# Altium PCB Condor2_REV_C.PcbDoc
Units mm, origin at the board's own origin, x right, y up, seen from the top; angles counter-clockwise.
Board outline 206.96 x 160.02 mm, 4 copper layers (Top Layer, Layer 1, Layer 2, Bottom Layer), stack 1.641 mm thick; 62 components, 99 nets, 385 pads, 129 vias.
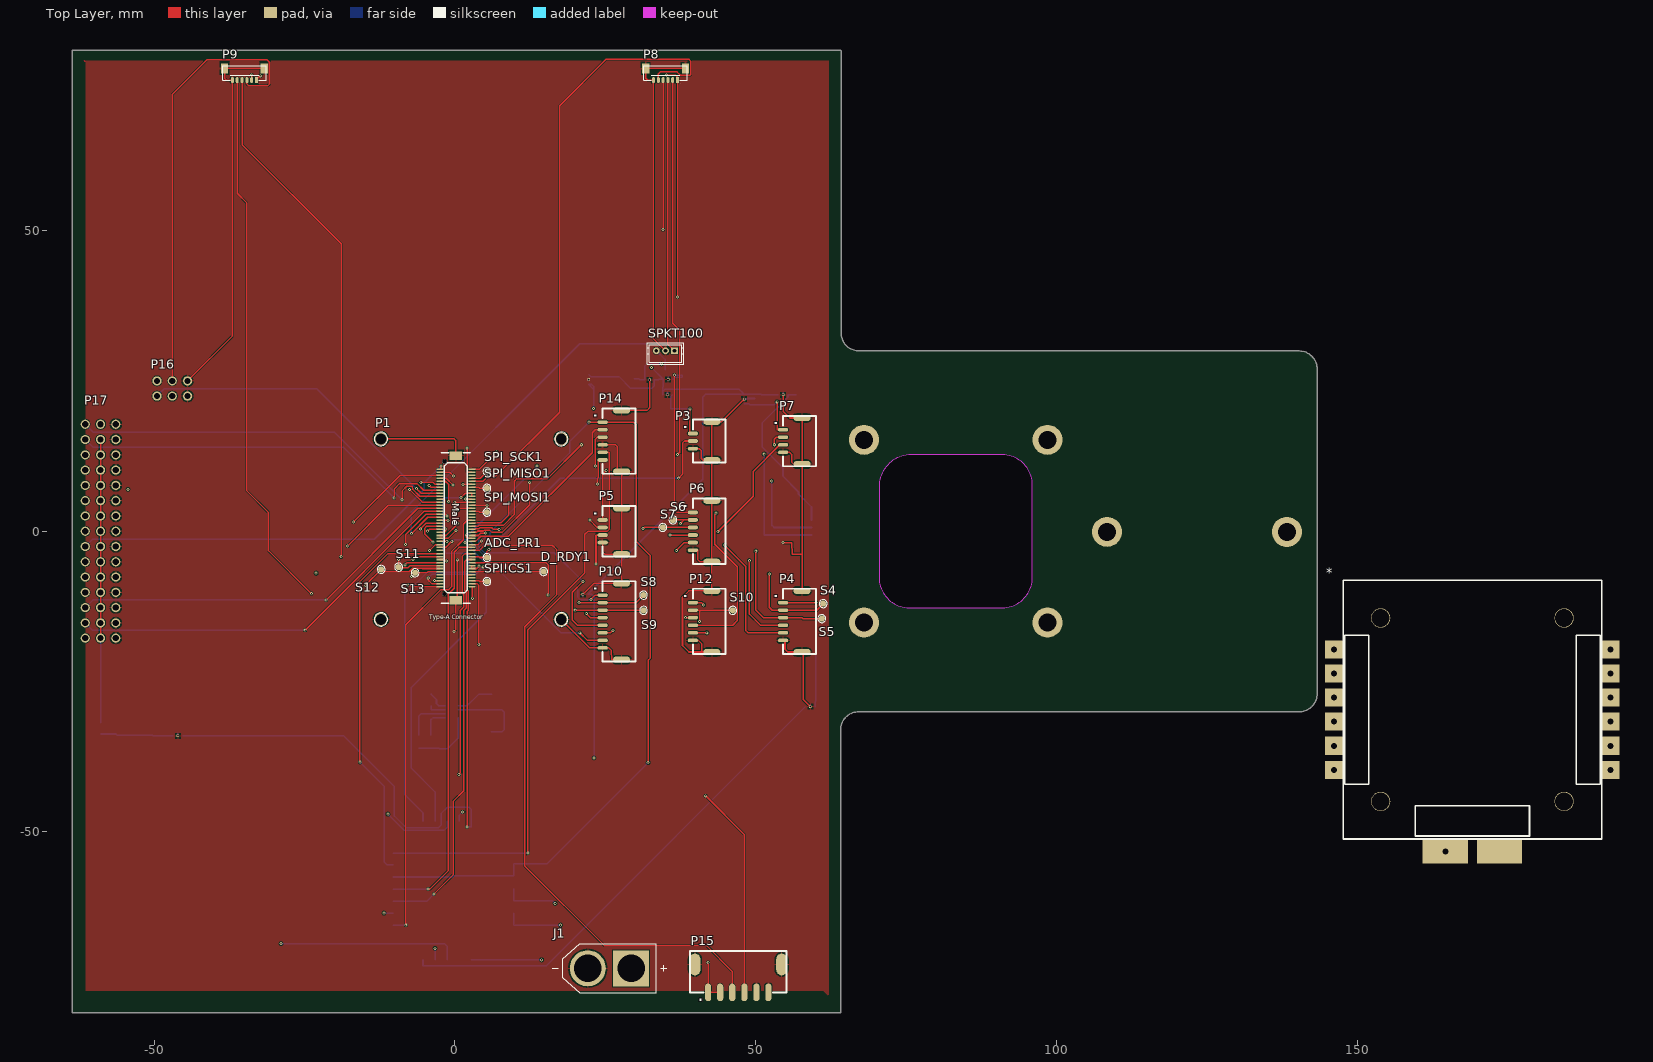
[diagram p0: Top Layer view]
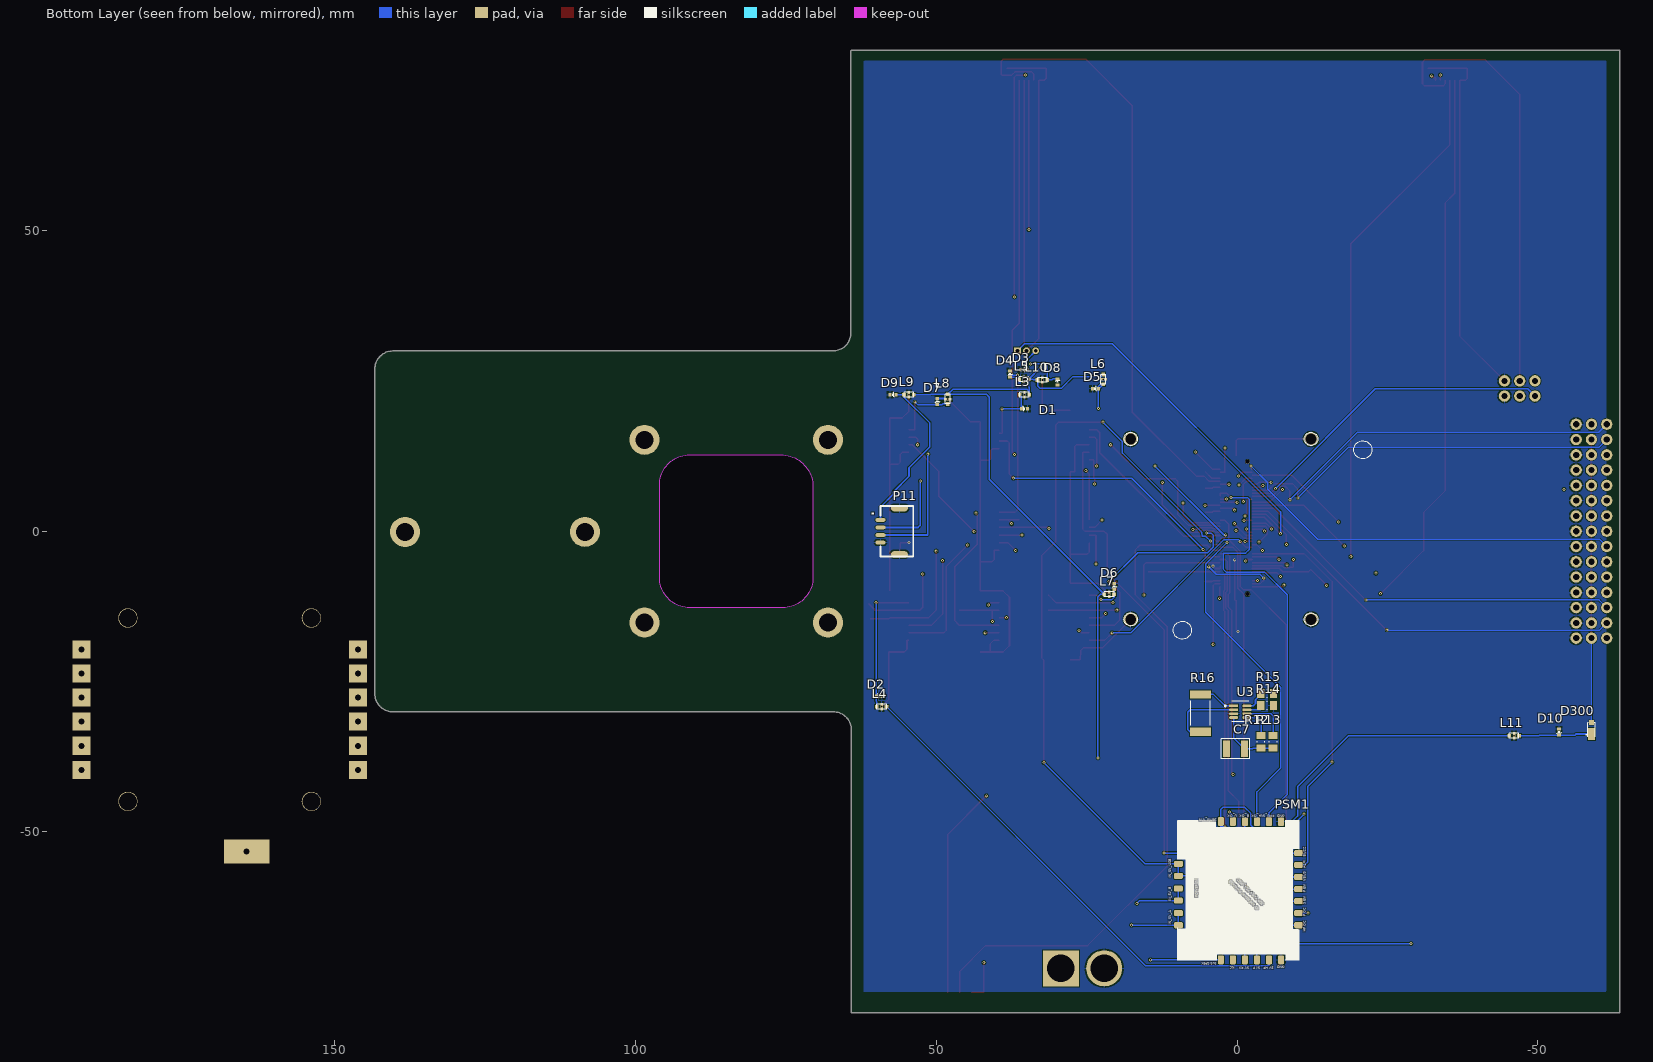
[diagram p1: Bottom Layer view, seen from below]
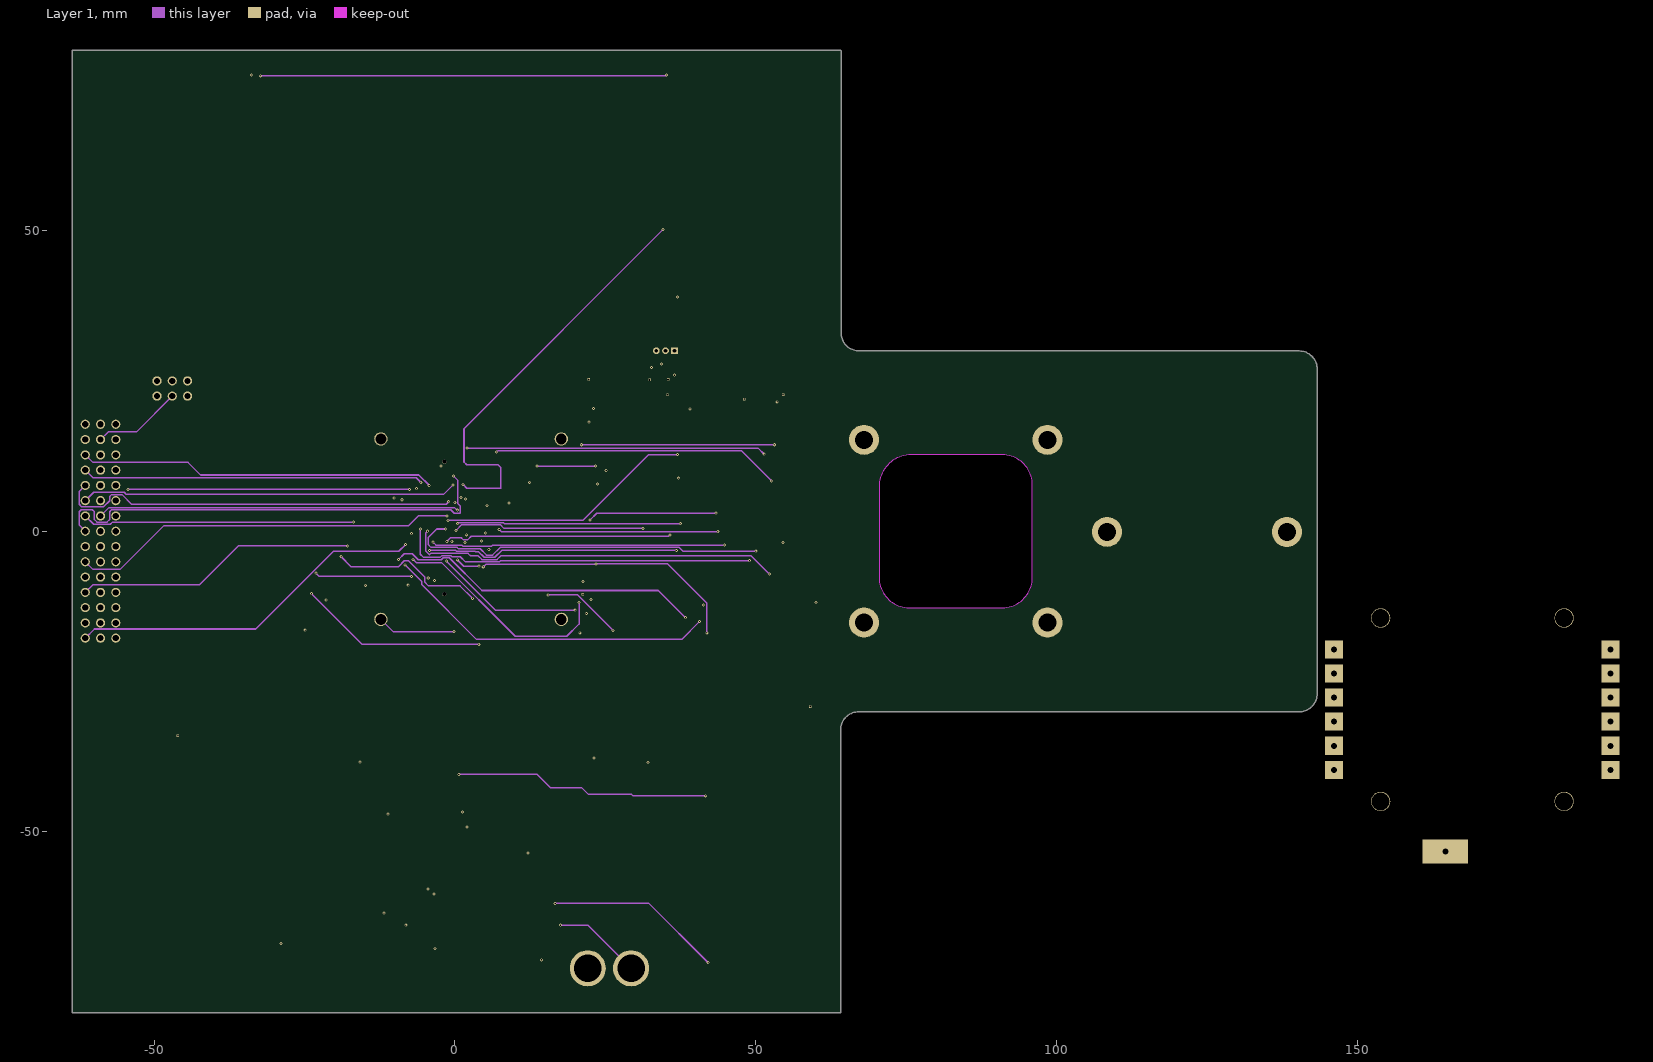
[diagram p2: Layer 1]
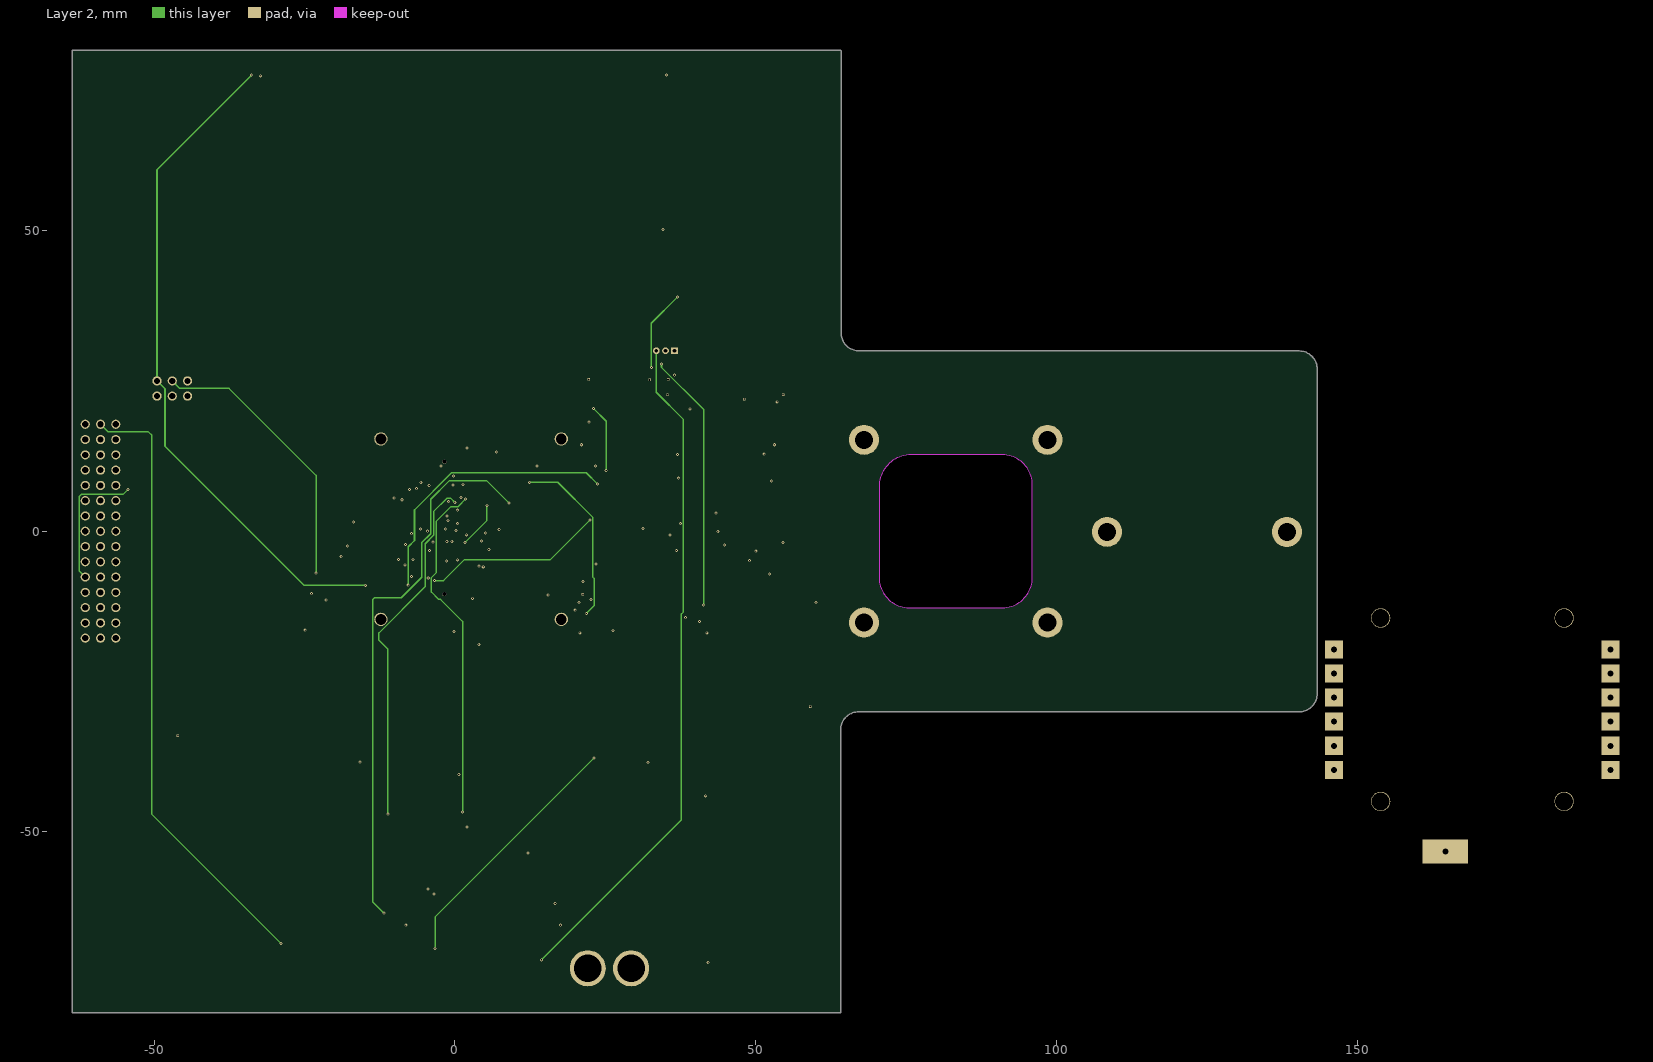
[diagram p3: Layer 2]
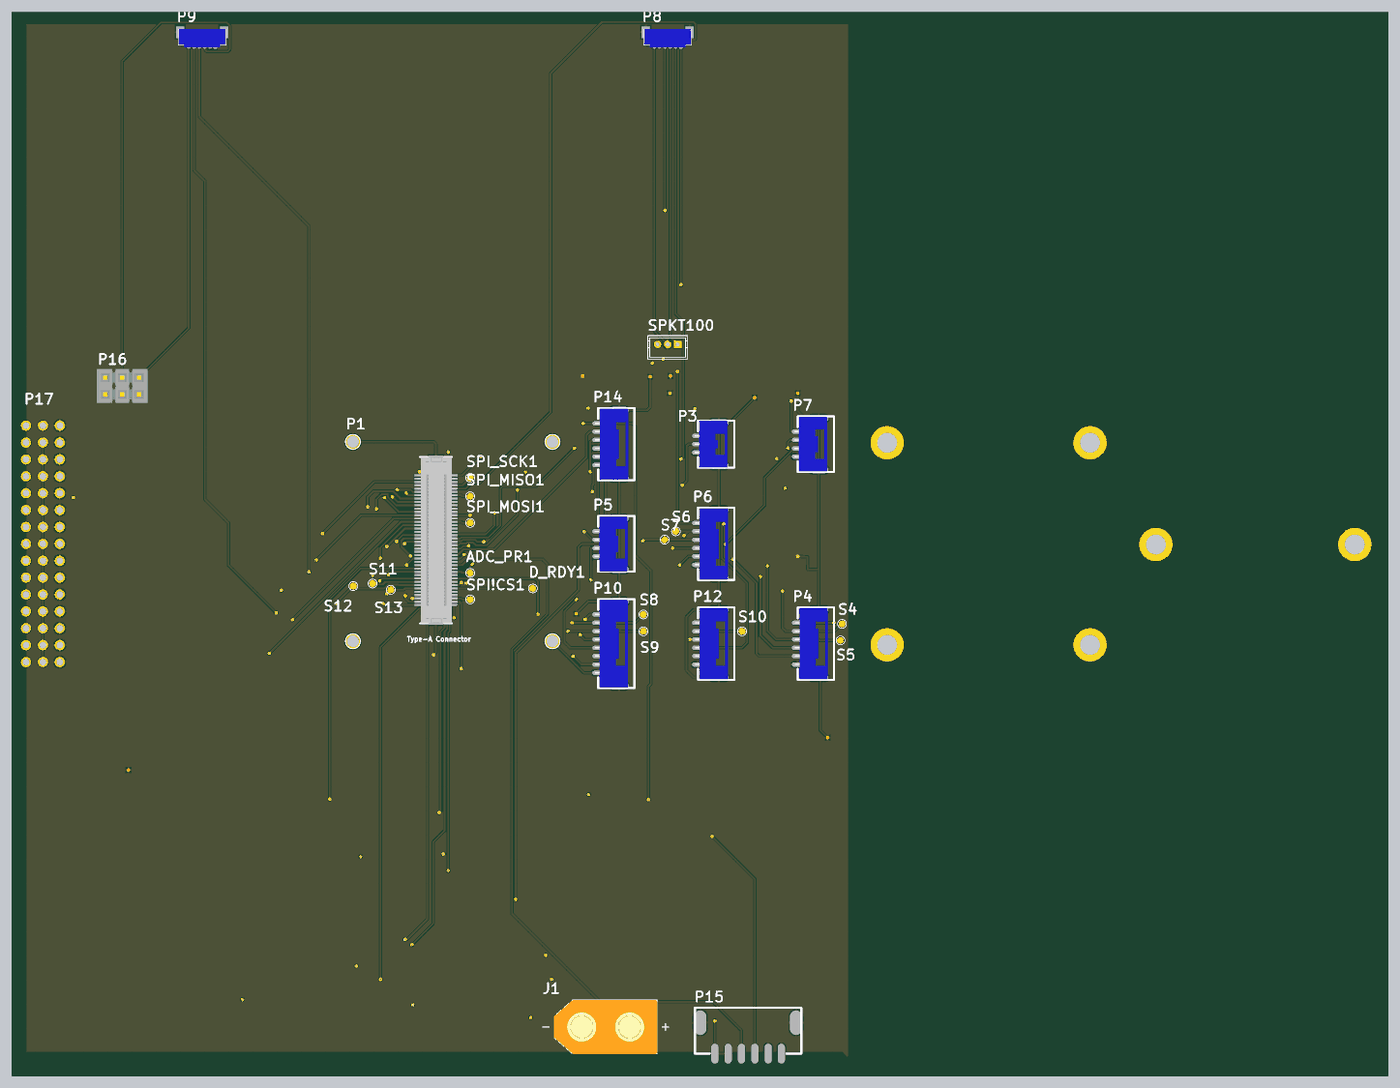
[diagram p4: 3D render of the assembled board from above, using the file's embedded part models]
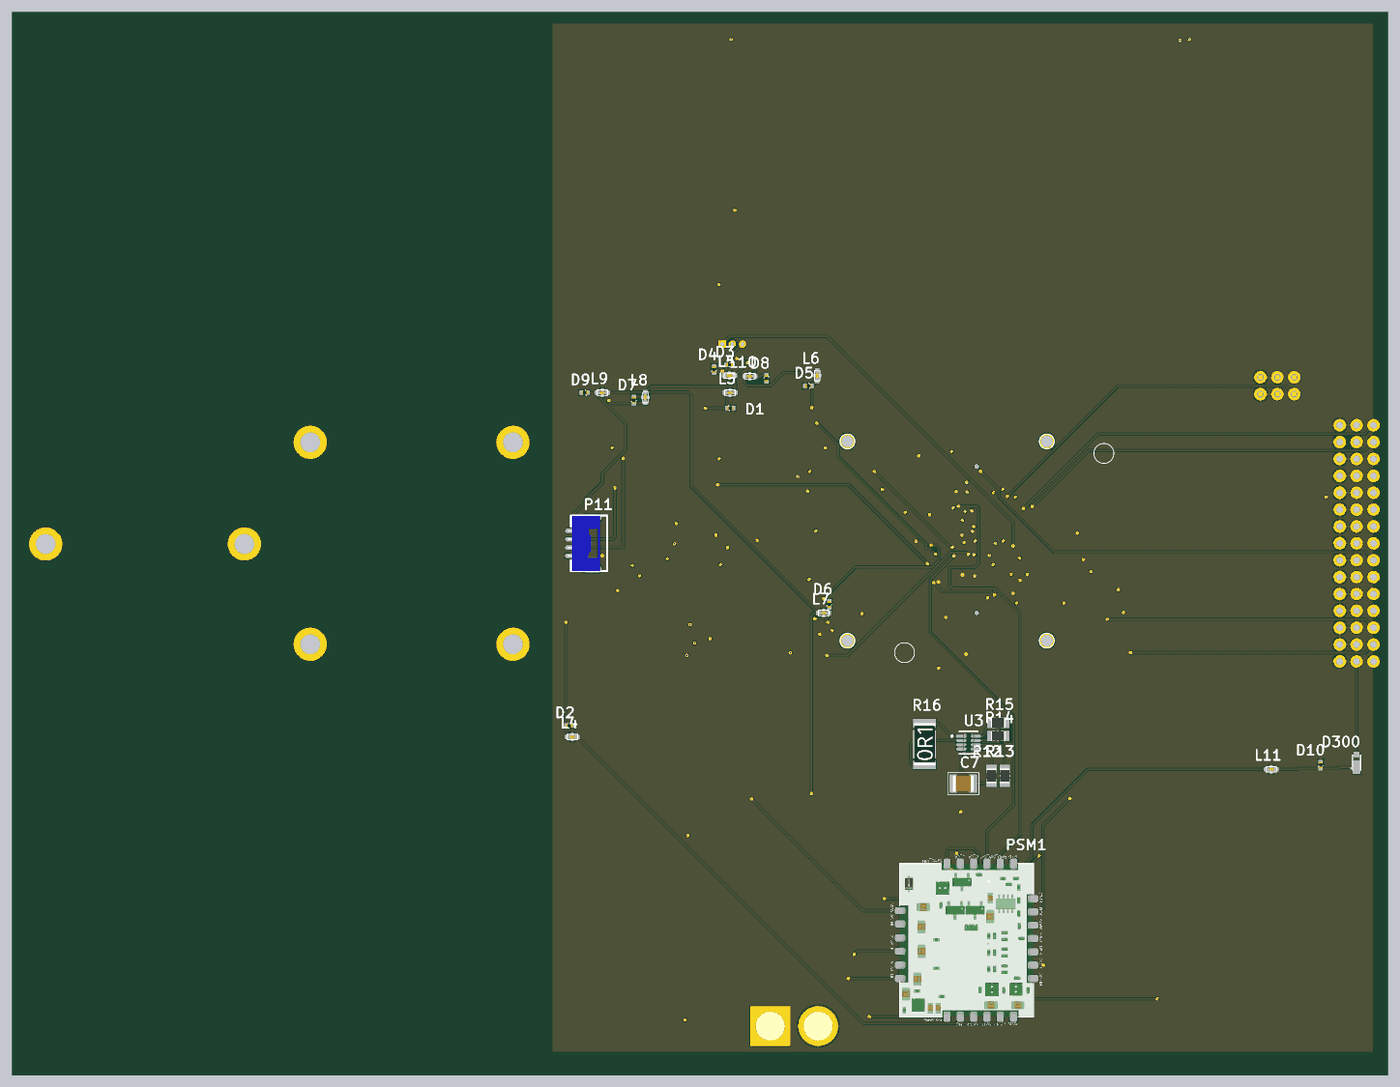
[diagram p5: 3D render of the assembled board from below, using the file's embedded part models]

## Layer stack, top to bottom
Top Solder: solder mask 0.0102, Solder Resist, Dk 3.5
Top Layer: signal copper 0.0356
Dielectric 1: core 0.5, FR-4, Dk 4.8
Layer 1: signal copper 0.035
Dielectric 2: prepreg 0.5, PP-006, Dk 4.8
Layer 2: signal copper 0.035
Dielectric 4: core 0.5, Dk 4.8
Bottom Layer: signal copper 0.0356
Bottom Solder: solder mask 0.0102, Solder Resist, Dk 3.5

## Board outline
-63.627,-80.061 -63.627,79.959 64.11,79.959 64.186,79.883 64.186,32.972 ccw(c67.186,32.972) 67.186,29.972 67.183,29.972 140.332,29.972 cw(c140.332,26.972) 143.332,26.972 143.332,-27.023 cw(c140.332,-27.023) 140.332,-30.023 67.11,-30.023 ccw(c67.11,-33.023) 64.11,-33.023 64.11,-80.035 64.084,-80.061
cut-out: 70.5,-7.7 ccw(c75.5,-7.7) 75.5,-12.7 75.519,-12.696 91.008,-12.696 91,-12.7 ccw(c91,-7.7) 96,-7.7 96,7.7 ccw(c91,7.7) 91,12.7 75.803,12.705 ccw(c75.803,7.402) 70.5,7.402

## Design rules (kind name [scope] priority, off if disabled: settings)
Clearance "Polygon clearance" [InPolygon vs InPolygon] p1: gap=0.3 ignorepadtopadclearanceinfootprint=FALSE except(0: Arc-Hole Track-Hole SMDPad-Hole THPad-Hole Via-Hole Fill-Hole Poly-Hole Region-Hole Text-Hole)
Clearance Clearance_1 [All] p2: gap=0.127 ignorepadtopadclearanceinfootprint=FALSE except(0: Arc-Hole Track-Hole SMDPad-Hole THPad-Hole Via-Hole Fill-Hole Poly-Hole Region-Hole Text-Hole)
Clearance mdViaVia [IsVia vs IsVia] p3: gap=0.127 ignorepadtopadclearanceinfootprint=FALSE except(0: Arc-Hole Track-Hole SMDPad-Hole THPad-Hole Via-Hole Fill-Hole Poly-Hole Region-Hole Text-Hole)
Clearance mdPadVia [IsPad vs IsVia] p4: gap=0.127 ignorepadtopadclearanceinfootprint=FALSE except(0: Arc-Hole Track-Hole SMDPad-Hole THPad-Hole Via-Hole Fill-Hole Poly-Hole Region-Hole Text-Hole)
Clearance mdPadPad [IsPad vs IsPad] p5: gap=0.127 ignorepadtopadclearanceinfootprint=FALSE except(0: Arc-Hole Track-Hole SMDPad-Hole THPad-Hole Via-Hole Fill-Hole Poly-Hole Region-Hole Text-Hole)
Clearance mdWireVia [(InLayerClass('Signal Layers') AND IsTrack) vs IsVia] p6: gap=0.127 ignorepadtopadclearanceinfootprint=FALSE except(0: Arc-Hole Track-Hole SMDPad-Hole THPad-Hole Via-Hole Fill-Hole Poly-Hole Region-Hole Text-Hole)
Clearance mdWirePad [(InLayerClass('Signal Layers') AND IsTrack) vs IsPad] p7: gap=0.127 ignorepadtopadclearanceinfootprint=FALSE except(0: Arc-Hole Track-Hole SMDPad-Hole THPad-Hole Via-Hole Fill-Hole Poly-Hole Region-Hole Text-Hole)
Clearance mdWireWire [(InLayerClass('Signal Layers') AND IsTrack) vs (InLayerClass('Signal Layers') AND IsTrack)] p8: gap=0.127 ignorepadtopadclearanceinfootprint=FALSE except(0: Arc-Hole Track-Hole SMDPad-Hole THPad-Hole Via-Hole Fill-Hole Poly-Hole Region-Hole Text-Hole)
ComponentClearance ComponentClearance_1 [(HasFootprint('ed') OR HasFootprint('CON-DF17-80M') OR HasFootprint('DF40-70_RECEPTICAL') OR HasFootprint('PSM') OR HasFootprint('PEM-SMTSO-M1.6-2-ET') OR HasFootprint('HEADER_1X06-FTDI') OR HasFootprint('3DR-WORDMARK-short'))] p1: gap=0 collisioncheckmode=3 verticalgap=0 showdistances=FALSE
ComponentClearance [All] p2 off: gap=0.076 collisioncheckmode=3 verticalgap=0 showdistances=FALSE
HoleSize [All] p1: absolutevalues=TRUE maxlimit=2540 minlimit=0.2 maxpercent=80.000 minpercent=20.000
HoleToHoleClearance [All] p1: gap=0.203 allowstackedmicrovias=TRUE
MinimumSolderMaskSliver [All] p1 off: minsoldermaskwidth=0.254
PasteMaskExpansion [All] p1: expansion=0.025
PolygonConnect PolygonConnect_1 [(InComponent('U2') OR InComponent('L6') OR HasFootprint('PEM-SMTSO-M1.6-2-ET') OR HasFootprint('MOUNT-HOLE1.8'))] p1: connectstyle=Direct reliefconductorwidth=0.254 reliefentries=4 polygonreliefangle="90 Angle" airgapwidth=0.254
PolygonConnect ThermalVias [IsVia] p2: connectstyle=Direct reliefconductorwidth=0.254 reliefentries=4 polygonreliefangle="90 Angle" airgapwidth=0.254
PolygonConnect [All] p3: connectstyle=Relief reliefconductorwidth=0.254 reliefentries=4 polygonreliefangle="90 Angle" airgapwidth=0.254
RoutingVias [All] p1: holewidth=0.2 width=0.5 viastyle="Through Hole" minholewidth=0.2 minwidth=0.5 maxholewidth=0.711 maxwidth=1.27
SilkToBoardRegionClearance [All] p1 off:
SilkToSilkClearance [All] p1 off: silktosilkclearance=0.254
SilkToSolderMaskClearance [IsPad] p1 off: minsilkscreentomaskgap=0.254 clearancetoexposedcopper=TRUE
SolderMaskExpansion [All] p1: expansion=0.025 istentingtop=FALSE
Width [All] p1: maxlimit=2 minlimit=0.15 preferedwidth=0.254
22 further rules are at their usual default settings.

## Classes and differential pairs
component class Condor2_ESC: *
component class Condor2_CV_Sensors: C7 C? R12 R13 R14 R15 R16 R? U3 U?
component class Condor2_Plugs_REV_C: 3 D1 D2 D3 D4 D5 D6 D7 D8 D9 L3 L4 L5 L6 L7 L8 L9 L10 P3 P4 P5 P6 P7 P8 P9 P10 P11 P12 SPKT100
component class Condor2__Power_REV_C: J1 P14 P15 PSM1
component class Condor2_Servo_REV_C: D10 D300 L11 P16 P17
component class Condor2_tp_REV_C: ADC_PR1 D_RDY1 S4 S5 S6 S7 S8 S9 S10 S11 S12 S13 SPI!CS1 SPI_MISO1 SPI_MOSI1 SPI_SCK1
component class Condor2_80_Pin_REV_C: FIDUCIALS1 P1

## Components (designator, comment, footprint, x,y, rotation, side; value= is the part's Value field where it differs from the comment)
* "ESC Foxeer Reaptor F4" "FOXEeR REAPER" 169.139,-29.667 r0 top
ADC_PR1 "PAD.04" PAD.04X.04 5.309,-4.369 r90 top
C7 "1210 0.1uF" 1210 0.254,-36.17 r180 bottom
D1 "DIODE-TVS" 0402-TVS 35.331,20.345 r180 bottom
D2 "DIODE-TVS" 0402-TVS 59.512,-27.432 r180 bottom
D3 "DIODE-TVS" 0402-TVS 35.42,26.848 r0 bottom
D4 "DIODE-TVS" 0402-TVS 37.744,26.137 r90 bottom
D5 "DIODE-TVS" 0402-TVS 23.546,23.698 r0 bottom
D6 "DIODE-TVS" 0402-TVS 20.396,-9.195 r90 bottom
D7 "DIODE-TVS" 0402-TVS 49.809,21.557 r90 bottom
D8 "DIODE-TVS" 0402-TVS 29.845,24.841 r270 bottom
D9 "DIODE-TVS" 0402-TVS 57.192,22.682 r0 bottom
D10 "DIODE-TVS" 0402-TVS -53.518,-33.401 r90 bottom
D300 "MSS1P4-M3" MICROSMP -58.928,-32.461 r90 bottom
D_RDY1 "PAD.04" PAD.04X.04 14.732,-6.706 r90 top
J1 "XT60-M" AMASS_XT60-M 25.679,-72.669 r180 top
L3 "Kyocera KNH16C104DA5TS EMI filter" KYOCERA-KNH16-DA 35.331,22.682 r0 bottom
L4 "Kyocera KNH16C104DA5TS EMI filter" KYOCERA-KNH16-DA 59.068,-29.159 r0 bottom
L5 "Kyocera KNH16C104DA5TS EMI filter" KYOCERA-KNH16-DA 35.42,25.248 r0 bottom
L6 "Kyocera KNH16C104DA5TS EMI filter" KYOCERA-KNH16-DA 22.225,25.248 r270 bottom
L7 "Kyocera KNH16C104DA5TS EMI filter" KYOCERA-KNH16-DA 21.26,-10.49 r180 bottom
L8 "Kyocera KNH16C104DA5TS EMI filter" KYOCERA-KNH16-DA 48.082,21.971 r270 bottom
L9 "Kyocera KNH16C104DA5TS EMI filter" KYOCERA-KNH16-DA 54.55,22.682 r0 bottom
L10 "Kyocera KNH16C104DA5TS EMI filter" KYOCERA-KNH16-DA 32.36,25.146 r180 bottom
L11 "Kyocera KNH16C104DA5TS EMI filter" KYOCERA-KNH16-DA -46.076,-34.011 r0 bottom
P1 "CON-DF17-80M" CON-DF17-80M 0.152,0.559 r270 top
P3 "JST_GH_V3" JST_GH_V3 45,15 r270 top
P4 "JST_GH_V6" JST_GH_V6 60,-15 r270 top
P5 "JST_GH_V4" JST_GH_V4 30,0 r270 top
P6 "JST_GH_V6" JST_GH_V6 45,0 r270 top
P7 "JST_GH_V4" JST_GH_V4 60,15 r270 top
P8 "JST_SUR_6" JST_SUR_H6 35,77 r180 top
P9 "JST_SUR_6" JST_SUR_H6 -35,77 r180 top
P10 "JST_GH_V8" JST_GH_V8 30,-15 r270 top
P11 "JST_GH_V4" JST_GH_V4 53.826,0 r270 bottom
P12 "JST_GH_V6" JST_GH_V6 45,-15 r270 top
P14 "JST_GH_V6" JST_GH_V6 30,15 r270 top
P15 "CLICKMATE_2_6" CLICKMATE_V6_2MM 47.092,-69.774 r0 top
P16 "con 2x6" TSW-103-07-G-D -47,25 r90 top
P17 "PH_2 Servo header" TSW-115-08-G-T-RA -58.928,0 r0 top
PSM1 "Power Selection module" PSM 0,-60 r90 bottom
R12 "SMD Resistor 0805" "RES 0805" -4,-35 r270 bottom
R13 "SMD Resistor 0805" "RES 0805" -6,-35 r270 bottom
R14 "SMD Resistor 0805" "RES 0805" -5,-29 r180 bottom
R15 "SMD Resistor 0805" "RES 0805" -5,-27 r180 bottom
R16 "Shut Resistor" PT2512 6.071,-30.226 r90 bottom
S4 "PAD.04" PAD.04X.04 61.214,-12.04 r0 top
S5 "PAD.04" PAD.04X.04 60.985,-14.529 r0 top
S6 "PAD.04" PAD.04X.04 36.233,1.875 r0 top
S7 "PAD.04" PAD.04X.04 34.55,0.625 r0 top
S8 "PAD.04" PAD.04X.04 31.344,-10.625 r0 top
S9 "PAD.04" PAD.04X.04 31.344,-13.157 r0 top
S10 "PAD.04" PAD.04X.04 46.177,-13.157 r90 top
S11 "PAD.04" PAD.04X.04 -9.373,-5.969 r0 top
S12 "PAD.04" PAD.04X.04 -12.268,-6.353 r90 top
S13 "PAD.04" PAD.04X.04 -6.629,-6.909 r90 top
SPI!CS1 "PAD.04" PAD.04X.04 5.309,-8.359 r90 top
SPI_MISO1 "PAD.04" PAD.04X.04 5.309,7.154 r90 top
SPI_MOSI1 "PAD.04" PAD.04X.04 5.309,3.154 r90 top
SPI_SCK1 "PAD.04" PAD.04X.04 5.309,9.92 r90 top
SPKT100 "CONN_SPEKTRUM_RX-TH" B3B-ZR 35,30 r180 top
U3 "INA219AIDCNR" INA219 -0.547,-30 r180 bottom

## Footprints (in the part's own frame and the unit in brackets; to place one, negate y for a bottom-side part, rotate by r counter-clockwise, add the part's x,y. Pads: shape width x height; smd on the part's side, far side on the other; paste and mask are expansions set on the pad)
0402-TVS [mil] "0402-TVS"
  rect 20x24 smd: A(20,0) C(-19.69,0)
  silkscreen extent -10,-16 3,16, body extent -20,-10 20,10, height 20
1210 [mm]
  rect 1.15x2.7 smd: 1(-1.5,0) 2(1.5,0)
  silkscreen extent -2.35,-1.65 2.35,1.65, body extent -1.6,-1.25 1.6,1.25, height 1.9
AMASS_XT60-M [mm]
  round 6 hole 4.55: N(3.6,0)
  rect 6x6 / inner round 6 / far side rect 6x6 hole 4.55: P(-3.6,0)
  silkscreen extent -9.5,-4.05 9.5,4.05, body extent -7.75,-4.05 7.75,4.05, height 15.75
B3B-ZR [mil]
  rect 44x44 hole 24: 1(-59.06,0)
  round 44 hole 24: 2(0,0) 3(60,0)
  silkscreen extent -118,-51 119,87
CLICKMATE_V6_2MM [mil]
  rrect100% 40x115 smd: 1(-196.85,-271.65) 2(-118.11,-271.65) 3(-39.37,-271.65) 4(40,-271.65) 5(119,-271.65) 6(197,-271.65)
  rrect100% 71x142 smd: GND(-283.46,-88.58) GND(284,-88.58)
  silkscreen extent -315,-272 315,0
CON-DF17-80M [mil]
  rrect100% 10x44 smd: 1(384,105)
  rect 10x44 smd: 2(384,-104.33) 3(365,105) 4(365,-104.33) 5(345,105) 6(345,-104.33) 7(325,105) 8(325,-104.33) 9(306,105) 10(306,-104.33) 11(286,105) 12(286,-104.33) 13(266,105) 14(266,-104.33) 15(247,105) 16(247,-104.33) 17(227,105) 18(227,-104.33) 19(207,105) 20(207,-104.33) 21(188,105) 22(188,-104.33) 23(168,105) 24(168,-104.33) 25(148,105) 26(148,-104.33) 27(128,105) 28(128,-104.33) 29(109,105) 30(109,-104.33) 31(89,105) 32(89,-104.33) 33(69,105) 34(69,-104.33) 35(50,105) 36(50,-104.33) 37(30,105) 38(30,-104.33) 39(10,105) 40(10,-104.33) 41(-9.84,105) 42(-9.84,-104.33) 43(-29.53,105) 44(-29.53,-104.33) 45(-49.21,105) 46(-49.21,-104.33) 47(-68.9,105) 48(-68.9,-104.33) 49(-88.58,105) 50(-88.58,-104.33) 51(-108.27,105) 52(-108.27,-104.33) 53(-127.95,105) 54(-127.95,-104.33) 55(-147.64,105) 56(-147.64,-104.33) 57(-167.32,105) 58(-167.32,-104.33) 59(-187.01,105) 60(-187.01,-104.33) 61(-206.69,105) 62(-206.69,-104.33) 63(-226.38,105) 64(-226.38,-104.33) 65(-246.06,105) 66(-246.06,-104.33) 67(-265.75,105) 68(-265.75,-104.33) 69(-285.43,105) 70(-285.43,-104.33) 71(-305.12,105) 72(-305.12,-104.33) 73(-324.8,105) 74(-324.8,-104.33) 75(-344.49,105) 76(-344.49,-104.33) 77(-364.17,105) 78(-364.17,-104.33) 79(-383.86,105) 80(-383.86,-104.33)
  round 87 hole 71: GND(-582,690) GND(-582,-491) GND(599,690) GND(599,-491)
  rect 56x83 smd: GND(-472.44,0) GND(473,0)
  round 26 hole 26 unplated: hole-1(-433.07,-74.8) hole-2(434,-74.8)
  silkscreen extent -626,-535 643,734, body extent -492,-109 492,115, height 124
"FOXEeR REAPER" [mm] "_128K"
  round 3.2 hole 3: 0(-15.25,-15.25) 0(-15.25,15.25) 0(15.25,-15.25) 0(15.25,15.25)
  rect 3x3 hole 1: 1(-23,10) 2(-23,6) 3(-23,2) 4(-23,-2) 5(-23,-6) 6(-23,-10) 9(23,-10) 10(23,-6) 11(23,-2) 12(23,2) 13(23,6) 14(23,10)
  rect 7.5x4 hole 1: 7(-4.5,-23.6)
  rect 7.5x4 smd: 8(4.5,-23.6)
  silkscreen extent -21.5,-21.5 21.5,21.5, body extent -20,-20.25 20,20.25, height 4.5
INA219 [mm]
  rect 1.505x0.455 smd paste+0 mask+0: 1(-1.1,0.975)
  rrect100% 1.505x0.455 smd paste+0 mask+0: 2(-1.1,0.325) 3(-1.1,-0.325) 4(-1.1,-0.975) 5(1.1,-0.975) 6(1.1,-0.325) 7(1.1,0.325) 8(1.1,0.975)
  silkscreen extent -2.63,-1.7 1.4,1.7, body extent -1.4,-1.45 1.4,1.45, height 1.45
JST_GH_V3 [mil]
  rrect100% 24x67 smd: 1(-49.21,-214.57) 2(0,-214.57) 3(50,-214.57)
  rrect100% 40x111 smd: GND(-125.98,-90.55) GND(126,-90.55)
  silkscreen extent -140,-215 140,0, body extent -138,-235 138,-40, height 165
JST_GH_V4 [mil]
  rrect100% 24x67 smd: 1(-73.82,-214.57) 2(-24.61,-214.57) 3(25,-214.57) 4(74,-214.57)
  rrect100% 40x111 smd: GND(-150.59,-90.55) GND(151,-90.55)
  silkscreen extent -164,-215 165,0, body extent -162,-235 163,-40, height 165
JST_GH_V6 [mil]
  rrect100% 24x67 smd: 1(-123.03,-214.57) 2(-73.82,-214.57) 3(-24.61,-214.57) 4(25,-214.57) 5(74,-214.57) 6(124,-214.57)
  rrect100% 40x111 smd: GND(-199.8,-90.55) GND(200,-90.55)
  silkscreen extent -214,-215 214,0, body extent -212,-232 212,-37, height 165
JST_GH_V8 [mil]
  rrect100% 24x67 smd: 1(-172.24,-214.57) 2(-123.03,-214.57) 3(-73.82,-214.57) 4(-24.61,-214.57) 5(25,-214.57) 6(74,-214.57) 7(124,-214.57) 8(173,-214.57)
  rrect100% 40x111 smd: GND(-249.02,-90.55) GND(250,-90.55)
  silkscreen extent -263,-215 263,0, body extent -261,-234 261,-39, height 165
JST_SUR_H6 [mm]
  rect 0.5x1 smd: 1(-2,2)
  rrect100% 0.5x1 smd: 2(-1.2,2) 3(-0.4,2) 4(0.4,2) 5(1.2,2) 6(2,2)
  rect 1.2x1.7 smd: GND(-3.3,0.05) GND(3.3,0.05)
  silkscreen extent -3.6,-0.4 3.6,2, body extent -3.5,-0.4 3.5,2.3, height 1.7
KYOCERA-KNH16-DA [mil] "KYOCERA-KNH16-DA"
  rect 16x16 smd: GND(0,-15.75) GND(0,16)
  rect 16x16 hole 12: GND(0,0)
  rect 24x24 smd: P$1(-31.5,0) P$2(32,0)
  silkscreen extent -31,-16 32,16, body extent -20,-10 20,10, height 14
MICROSMP [mil]
  rect 32x32 smd: ANODE(26,0)
  rect 79x44 smd: CATHODE(-49.21,0)
  silkscreen extent -67,-24 24,35
PAD.04X.04 [mil]
  rrect100% 40x40 smd paste-78.74: P$1(0,0)
  silkscreen extent -26,-26 26,26
PSM [mm]
  rrect50% 1.5x1.016 smd: 5V_HIPOWER(-11.25,-5.317) 5V_PERIPH(-11.25,-3.317) !VBUS_VALID(11.75,0.686) !VDD_BACKUP_VALID(11.75,-1.317) !VDD_BRICK_VALID(11.75,-3.317) GND(-11.25,-7.317) GND(11.75,-7.317) NC(-11.25,0.686) RX(-11.25,-1.317) SERVO_IN(11.75,2.692) SPEK(-11.25,2.692) VDD_5V_IN_PROT(11.75,-5.317)
  rrect50% 1.016x1.5 smd: !VDD_5V_HIPOWER_OC(-5.5,-10.25) !VDD_5V_PERIPH_EN(0.508,-10.25) !VDD_5V_PERIPH_OC(-3.5,-10.25) ALARM(4.521,-10.25) BUZZER_OUT(6.502,-10.25) VBUS(2.515,-10.25) VDD_3V3_SPEKTRUM_EN(-1.5,-10.25) VDD_5V_BACKUP(-1.4,9.75) VDD_5V_BACKUP(0.6,9.75) VDD_BRICK_IN(-5.5,9.75) VDD_BRICK_IN(-3.5,9.75) VDD_VBUS(2.7,9.75) VDD_VBUS(4.7,9.75)
  silkscreen extent -11.33,-10.32 11.9,9.83, body extent -11.3,-10.24 11.66,9.73, height 2.11
PT2512 [mm]
  rect 1.358x3.458 smd paste+0 mask+0: 1(-3.102,0) 2(3.102,0)
  silkscreen extent -2.05,-1.6 2.05,1.6, body extent -3.17,-1.6 3.17,1.6, height 0.65
"RES 0805" [mm] "Chip Resistor, 2-Leads, Body 2.2x1.4mm, IPC Low Density"
  rect 1.2x1.5 smd: 1(-1.05,0) 2(1.05,0)
  silkscreen extent -0.05,-0.65 0.05,0.65, body extent -1.1,-0.7 1.1,0.7, height 0.5
TSW-103-07-G-D [mil] "2x6 pin"
  round 60 / inner round 60 / far side round 74.02 hole 40.16: 1(-100,100) 2(0,100) 3(-100,0) 4(0,0) 5(-100,-100) 6(0,-100)
  body extent -150,-150 50,150, height 330
TSW-115-08-G-T-RA [mil] "15 pin head"
  round 60 / inner round 60 / far side round 74.02 hole 40.16: 1(-100,-700) 2(-100,-600) 3(-100,-500) 4(-100,-400) 5(-100,-300) 6(-100,-200) 7(-100,-100) 8(-100,0) 9(-100,100) 10(-100,200) 11(-100,300) 12(-100,400) 13(-100,500) 14(-100,600) 15(-100,700) GND(100,-700) GND(100,-600) GND(100,-500) GND(100,-400) GND(100,-300) GND(100,-200) GND(100,-100) GND(100,0) GND(100,100) GND(100,200) GND(100,300) GND(100,400) GND(100,500) GND(100,600) GND(100,700) "RX 5V"(0,700) "SERVO VCC"(0,-700) "SERVO VCC"(0,-600) "SERVO VCC"(0,-500) "SERVO VCC"(0,-400) "SERVO VCC"(0,-300) "SERVO VCC"(0,-200) "SERVO VCC"(0,-100) "SERVO VCC"(0,0) "SERVO VCC"(0,100) "SERVO VCC"(0,200) "SERVO VCC"(0,300) "SERVO VCC"(0,400) "SERVO VCC"(0,500) "SERVO VCC"(0,600)

## Part data
C7: library part "Capacitor 1210"
D1 D2 D3 D4 D5 D6 D7 D8 D9 D10: "Diode, TVS, 14VWM, 40VC, 0402, SMD", Supplier Part Number 1=650-PESD0402-140, Supplier 1=Mouser
D300: library part DIODE-SCHOTTKY_MSMP, "Diode, Schottky, 40V, 1A, MicroSMP, SMD", Supplier Part Number 1=15R2105, Supplier 1=Newark
J1: "Plug; DC supply; XT60; male; PIN: 2; for cable; soldered; 30A; 500V", Package=Package, Availability="Not in stock", Check_prices=https://www.snapeda.com/parts/XT60-M/AMASS/view-part/?ref=eda, MF=AMASS, MP=XT60-M, Price=None, SnapEDA_Link=https://www.snapeda.com/parts/XT60-M/AMASS/view-part/?ref=snap
L3 L4 L5 L6 L7 L8 L9 L10 L11: library part KNH16C104DA5TS, "Capacitor, Filter, 0.1uF, 25V, 2A, 0603, SMD", Supplier Part Number 1=478-6878-1-ND, Supplier 1=Digi-Key
P1: "Connector, Header, 80Pos, .5MM, DUAL, SMD, Au", Supplier Part Number 1=DF17(1.0H)-80DP-0.5V(57)-ND, Supplier 1=Digi-Key
P3: "BM03B-GHS-TBT", Supplier Part Number 1=455-1579-2-ND, Supplier 1=Digi-Key
P4 P6 P12 P14: "BM06B-GHS-TBT", Supplier Part Number 1=455-1582-2-ND, Supplier 1=Digi-Key
P5 P7 P11: "BM04B-GHS-TBT", Supplier Part Number 1=455-1580-2-ND, Supplier 1=Digi-Key
P8 P9: "Connector, Header, 6Pos, .8mm IDC, R/A, SMD, Tin", Supplier Part Number 1=SM06B-SURS-TF(LF)(SN)-ND, Supplier 1=Digi-Key
P10: "BM08B-GHS-TBT", Supplier Part Number 1=455-1584-2-ND, Supplier 1=Digi-Key
P15: "Connector, Header, 6Pos, 2.54MM, Vert, THT, Au", Supplier Part Number 1=WM2279CT-ND, Supplier 1=Digi-Key
P16: "Connector, Header, 6Pos, 2.54MM, Vert, THT, Au", Supplier Part Number 1=79P3920, Supplier 1=Newark
P17: "Connector, Header, 45Pos, 2.54MM, R/A, THT, Tin"
PSM1: library part PSMPSM, "PCA, PSM, Assembly"
R16: library part PT2512FK
SPKT100: "Spektrum RX connector; JST ZH series S3B-ZR-SM4A-TF", PARTNO=B3B-ZR(LF)(SN)
U3: library part INA219, "IC CURRENT MONITOR 1% SOT23-8", Case/Package=SOT-23-8, Input Offset Voltage (Vos)=100uV, Max Input Voltage=26V, Max Operating Temperature=125°C, Max Supply Current=5mA, Max Supply Voltage=5.5V, Min Input Voltage=0V, Min Operating Temperature=-40°C, Min Supply Voltage=3V, Nominal Supply Current=700uA, Operating Supply Current=1mA, Output Current=10mA, Package Quantity=3000, Accuracy=1%, Bandwidth=3.4MHz, Common Mode Rejection Ratio=100dB, Contact Plating=Gold, Features=I²C, Height=1.3mm, Lead Free="Lead Free", Length=3mm, Number of Amplifiers=1, Number of Pins=8, Output Current per Channel=10mA, Output Type=Digital, Packaging="Tape and Reel", Quiescent Current=700uA, Radiation Hardening=No, REACH SVHC="No SVHC", RoHS Compliant=Yes, Series=Zero-Drift, Supply Current=700uA, Weight=0.001411oz, Width=1.75mm

## Free pads (board coordinates)
  round 5 hole 3: 9(68,15.2) 10(98.5,15.2) 11(68,-15.2) 12(98.5,-15.2) 13(108.4,-0.1) 14(138.3,-0.102)

## Via types
v1: diameter 0.5, hole 0.2, Top Layer to Bottom Layer, 129 vias

## Nets (pads, with @x,y where several pads share a name; then routed paths per layer and width w, separated by ;. In a path a pad name is that pad's centre, name@x,y a point inside that pad or via, vN(x,y) a via of type N, cw(c..) or ccw(c..) an arc to the next point about the centre after c; other vN are vias at no path point)
5V_PRES: D1.C L3.P$2 P3.1 | length 10.3
  Top Layer w0.254: v1(39.065,20.345) 39.065,16.25 P3.1
  Bottom Layer w0.254: L3.P$2 35.831,22.369 D1.C v1(39.065,20.345)
ALARM: P1.24 PSM1.ALARM | length 65.2
  Top Layer w0.254: v1(-15.799,-38.405) -15.799,-8.357 -11.151,-3.708 P1.24
  Bottom Layer w0.254: v1(-15.799,-38.405) -11.76,-42.443 -11.76,-54.996 -11.278,-55.479 PSM1.ALARM
AUX_BATT_CURRENT_SENS: P1.25 P15.3 | length 114.8
  Top Layer w0.254: P1.25 4.089,-3.2 4.953,-2.337 16.18,-2.337 16.891,-3.048 16.891,-10.592 11.608,-15.875 11.608,-55.651 24.841,-68.885 41.799,-68.885 46.092,-73.177 P15.3
AUX_BATT_VOLTAGE_SENS: P1.23 P15.4 | length 116.3
  Top Layer w0.254: v1(0.635,-40.437) 0.838,-40.234 0.838,-13.233 1.46,-12.611 1.46,-10.49 1.245,-10.274 1.245,-4.14 1.676,-3.708 P1.23 ; v1(41.681,-43.993) 48.108,-50.419 P15.4
  Layer 1 w0.254: v1(0.635,-40.437) 13.691,-40.437 15.926,-42.672 21.107,-42.672 22.2,-43.764 29.362,-43.764 29.591,-43.993 v1(41.681,-43.993)
BATT_CURRENT_SENS_PROT: P1.49
BATT_VOLTAGE_SENS_PROT: P1.47
BUZZER_OUT: P14.5 PSM1.BUZZER_OUT | length 97.6
  Top Layer w0.254: v1(12.136,-53.498) 12.136,-16.388 21.59,-6.934 21.59,-0.495 22.06,-0.025 25.273,-0.025 25.679,0.381 25.654,13.12 P14.5
  Bottom Layer w0.254: PSM1.BUZZER_OUT v1(12.136,-53.498)
CAN_H_1: P1.79 P11.2 | length 67.3
  Top Layer w0.254: P1.79 4.064,10.309 v1(6.929,13.174)
  Layer 1 w0.254: v1(6.929,13.174) 7.097,13.341 47.669,13.341 v1(52.654,8.357)
  Bottom Layer w0.3: v1(52.654,8.357) 52.654,1.021 53.05,0.625 P11.2
CAN_H_2: P1.41 P7.2 | length 61.7
  Top Layer w0.254: P1.41 3.809,0.809 3.962,0.961 8.048,0.961 9.855,2.769 9.855,8.319 10.223,8.687 15.316,8.687 v1(21.006,14.376) ; v1(53.086,14.376) 53.086,15.295 53.416,15.625 P7.2
  Layer 1 w0.254: v1(21.006,14.376) v1(53.086,14.376)
CAN_H_3: P1.10
CAN_L_1: P1.77 P11.3 | length 75.9
  Top Layer w0.254: v1(2.007,13.818) 2.007,9.834 2.032,9.809 P1.77
  Layer 1 w0.254: v1(2.007,13.818) 50.394,13.818 v1(51.41,12.802)
  Bottom Layer w0.3: v1(51.41,12.802) 51.41,-0.56 51.485,-0.635 P11.3
CAN_L_2: P1.39 P7.3 | length 60.5
  Top Layer w0.254: P1.39 3.251,0.305 3.364,0.417 4.013,0.417 4.176,0.58 6.113,0.58 6.388,0.305 v1(7.358,0.305) ; v1(43.688,-0.076) 49.581,5.817 49.581,9.945 54,14.365 P7.3
  Layer 1 w0.254: v1(7.358,0.305) 7.739,-0.076 v1(43.688,-0.076)
CAN_L_3: P1.8
E\X\T\E\R\N\_\C\S\: P1.5 SPI!CS1.P$1 | length 2.6
  Top Layer w0.254: P1.5 3.962,-8.204 4.117,-8.359 SPI!CS1.P$1
EXTERN_DRDY: D_RDY1.P$1 P1.11 | length 11.9
  Top Layer w0.254: P1.11 D_RDY1.P$1
F\M\U\-\L\E\D\_\A\M\B\E\R\: P1.2 P14.6 | length 56.8
  Top Layer w0.254: v1(-7.772,-8.966) -7.544,-9.195 P1.2 ; v1(23.673,7.849) 23.673,8.788 23.851,8.966 23.851,11.85 P14.6
  Layer 2 w0.254: v1(-7.772,-8.966) -7.772,-2.591 -6.731,-1.549 -6.731,3.531 -0.559,9.703 21.819,9.703 v1(23.673,7.849)
FMU-!RESET: P1.7
FMU-CH1-PROT: P1.50 P17.1 | length 68.4
  Top Layer w0.254: v1(-8.204,-2.184) -8.204,-0.562 -4.833,2.809 P1.50
  Layer 1 w0.254: P17.1 -59.944,-16.256 -33.122,-16.256 -20.193,-3.327 -9.347,-3.327 v1(-8.204,-2.184)
FMU-CH2-PROT: P1.52 P17.2 | length 67.7
  Top Layer w0.254: v1(-24.899,-16.459) -5.131,3.309 P1.52
  Bottom Layer w0.254: P17.2 -60.249,-16.459 v1(-24.899,-16.459)
FMU-CH3-PROT: P1.54 P17.3 | length 65.8
  Top Layer w0.254: v1(-21.412,-11.43) -6.173,3.809 P1.54
  Bottom Layer w0.254: P17.3 -60.198,-11.43 v1(-21.412,-11.43)
FMU-CH4-PROT: P1.56 P17.4 | length 65
  Top Layer w0.254: v1(-17.831,-2.438) -11.084,4.309 P1.56
  Layer 1 w0.254: P17.4 -60.198,-8.89 -42.494,-8.89 -36.043,-2.438 v1(-17.831,-2.438)
FMU-CH5-PROT: P1.58 P17.5 | length 75.2
  Top Layer w0.254: v1(-7.569,6.96) -5.418,4.809 P1.58
  Layer 1 w0.254: v1(-54.356,6.96) v1(-7.569,6.96)
  Layer 2 w0.254: P17.5 -62.484,-6.604 -62.484,5.779 -62.141,6.121 -55.194,6.121 v1(-54.356,6.96)
FMU-CH6-PROT: P1.60 P17.6 | length 68
  Top Layer w0.254: P1.60 -1.821,5.309 -1.676,5.164 -1.676,2.896 v1(-1.321,2.54)
  Layer 1 w0.254: P17.6 -60.198,-6.35 -55.677,-6.35 -48.438,0.889 -7.752,0.889 -6.101,2.54 v1(-1.321,2.54)
FMU-SWCLK: P1.3 P9.5 | length 132.8
  Top Layer w0.254: P9.5 -36.2,56.19 -34.595,54.585 -34.595,6.706 -31.013,3.124 -31.013,-3.226 v1(-23.851,-10.389) ; P1.3 3.645,-8.712 3.962,-9.03 v1(3.962,-18.796)
  Layer 1 w0.254: v1(-23.851,-10.389) -15.443,-18.796 v1(3.962,-18.796)
FMU-SWDIO: P1.1 P9.4 | length 114.1
  Top Layer w0.254: P9.4 -35.4,64.254 -18.923,47.777 v1(-18.923,-4.242) ; P1.1 2.896,-9.195 v1(2.896,-11.151)
  Layer 1 w0.254: v1(-18.923,-4.242) -17.272,-5.893 -9.411,-5.893 -8.42,-4.902 -7.747,-4.902 -5.062,-7.587 -5.062,-8.415 -4.384,-9.093 0.838,-9.093 v1(2.896,-11.151)
GND: D1.A D2.A D3.A D4.A D5.A D6.A D7.A D8.A D9.A D10.A J1.N L3.GND L4.GND L5.GND L6.GND L7.GND L8.GND L9.GND L10.GND L11.GND P1.13 P1.15 P1.GND P3.3 P3.GND P4.6 P4.GND P5.4 P5.GND P6.6 P6.GND P7.4 P7.GND P8.6 P8.GND P9.6 P9.GND P10.8 P10.GND P11.4 P11.GND P12.6 P12.GND P14.4 P14.GND P15.5 P15.6 P15.GND P16.5 P16.6 P17.GND PSM1.GND R14.2 R15.2 SPKT100.2 U3.3 | length 355.9
  Top Layer w0.254: P16.6 -37,32.46 P9.6@-37,74.981 ; P9.6 P9.6@-37,74.981 ; P9.GND@-31.7,76.95 -38.3,76.95 -38.3,75.311 -37.97,74.981 P9.6@-37,74.981 ; P1.GND@-12.319,15.342 -0.165,15.342 0.152,15.024 P1.GND@0.152,12.559 ; v1(-0.178,-16.688) 0.152,-16.358 0.152,-11.455 0.381,-11.455 v1(0.381,-4.75) ; P1.15 P1.13 3.607,-6.198 v1(3.988,-5.817) ; P1.GND@17.678,-14.656 22.417,-19.394 P10.8 25.552,-19.394 26.01,-19.851 26.035,-21.35 P10.GND@27.7,-21.35 ; L7.GND@21.26,-10.49 23.075,-8.675 27.7,-8.675 P5.GND@27.7,-3.835 ; P5.4 24.536,-1.88 24.536,-3.454 24.917,-3.835 P5.GND@27.7,-3.835 ; P14.4 26.669,14.365 27,14.034 27,9.92 27.7,9.92 27.7,3.825 P5.GND@27.7,-3.835 ; P14.GND@27.7,20.075 31.902,20.075 32.36,20.532 L10.GND@32.36,25.146 ; P8.6 P8.6@33,74.981 ; SPKT100.2 33,32 P8.6@33,74.981 ; P8.GND@38.3,76.95 31.7,76.95 31.7,75.311 32.03,74.981 P8.6@33,74.981 ; P12.6 40.475,-18.15 40.996,-18.67 41.021,-20.08 ; P6.6 40.335,-3.15 40.335,-4.699 40.716,-5.08 P6.GND@42.7,-5.08 ; P3.3 40.613,13.73 40.945,13.399 40.945,12.128 41.274,11.8 P3.GND@42.7,11.8 ; P12.GND@42.7,-20.08 41.021,-20.08 ; L8.GND@48.082,21.971 44.311,18.2 42.7,18.2 P3.GND@42.7,11.8 ; P4.6 54.864,-18.15 54.864,-19.621 55.323,-20.08 57.7,-20.08 57.937,-20.08 57.937,-28.029 L4.GND@59.068,-29.159 ; v1(54.55,-1.88) 56.007,-1.956 56.032,-3.835 57.7,-3.835 ; P7.4 55.599,13.12 55.956,12.763 55.956,11.493 56.285,11.165 P7.GND@57.7,11.165 ; L9.GND@54.55,22.682 54.55,19.952 55.677,18.825 57.7,18.825 P7.GND@57.7,11.165 ; P4.GND@57.7,-9.925 57.7,-3.835 ; 41.021,-20.08 38.887,-20.08 37.825,-19.017 37.825,-10.988 38.887,-9.925 42.7,-9.925 P6.GND@42.7,-5.08 ; P6.GND@42.7,-5.08 42.7,5.075 P3.GND@42.7,11.8 ; 57.7,-3.835 P7.GND@57.7,11.165
  Layer 1 w0.254: P1.GND@-12.319,-14.656 -10.287,-16.688 v1(-0.178,-16.688) ; v1(0.381,-4.75) 1.448,-5.817 v1(3.988,-5.817)
  Bottom Layer w0.254: L11.GND@-46.076,-34.011 L11.GND@-46.076,-33.611 ; L7.GND@21.26,-10.89 L7.GND@21.26,-10.49 ; L10.GND@32.36,24.746 L10.GND@32.36,25.146 ; L3.GND@35.331,22.682 L3.GND@35.331,23.082 ; L5.GND@35.42,25.248 L5.GND@35.42,25.648 ; L8.GND@48.082,21.971 L8.GND@48.482,21.971 ; L9.GND@54.55,22.682 L9.GND@54.55,23.082 ; L4.GND@59.068,-29.159 L4.GND@59.068,-28.759
  Bottom Layer w0.3: L8.GND@48.576,22.065 D7.A
I2C_1_SCL: P1.37 P10.4 | length 48.1
  Top Layer w0.254: P1.37 3.535,-0.203 3.774,0.036 4.728,0.036 4.891,0.199 5.732,0.199 6.134,-0.203 7.823,-0.203 12.421,4.394 v1(12.421,8.128) ; v1(21.833,-13.677) 22.531,-14.375 P10.4
  Layer 2 w0.254: v1(12.421,8.128) 17.094,8.128 22.936,2.286 22.936,-7.671 23.114,-7.849 23.114,-12.395 v1(21.833,-13.677)
I2C_1_SDA: P1.35 P10.5 | length 38
  Top Layer w0.254: P1.35 3.868,-0.711 4.234,-0.345 5.06,-0.345 v1(5.1,-0.305) ; v1(21.26,-8.357) 19.482,-10.135 19.482,-14.757 20.359,-15.635 P10.5
  Bottom Layer w0.254: v1(5.1,-0.305) 4.318,-0.305 3.912,-0.711 3.912,-2.565 4.928,-3.581 16.485,-3.581 v1(21.26,-8.357)
I2C_2_SCL: P1.6 P5.2 P12.4 | length 82.2
  Top Layer w0.254: v1(-3.404,-8.204) P1.6 ; v1(22.428,1.854) 23.657,0.625 P5.2 ; P12.4 46.163,-15.635 46.939,-14.859 46.939,-5.918 43.18,-2.159 43.18,2.769 v1(43.409,2.997)
  Layer 1 w0.254: v1(22.428,1.854) 23.571,2.997 v1(43.409,2.997)
  Layer 2 w0.254: v1(-3.404,-8.204) -1.905,-8.204 1.596,-4.703 15.871,-4.703 v1(22.428,1.854)
I2C_2_SDA: P1.4 P5.3 P12.5 | length 66.8
  Top Layer w0.254: v1(-4.445,-7.798) -4.445,-8.149 -3.882,-8.712 P1.4 ; v1(23.444,-5.436) 23.444,-0.66 ; P12.5 v1(41.859,-16.88) ; 23.444,-0.66 23.47,-0.635 P5.3 23.444,-0.66
  Layer 1 w0.254: v1(4.699,-5.918) 5.135,-5.482 23.397,-5.482 v1(23.444,-5.436) 35.357,-5.436 41.859,-11.938 v1(41.859,-16.88)
  Bottom Layer w0.254: v1(-4.445,-7.798) -3.81,-7.163 3.454,-7.163 v1(4.699,-5.918)
I\O\-\L\E\D\_\S\A\F\E\T\_\P\R\O\T\: P1.28 P10.7 | length 34.5
  Top Layer w0.254: P1.28 -1.549,-2.692 v1(-0.533,-1.676) ; v1(20.757,-16.885) 22.022,-18.15 P10.7
  Bottom Layer w0.254: v1(-0.533,-1.676) -0.245,-1.388 2.15,-1.388 17.647,-16.885 v1(20.757,-16.885)
IN+: R16.2 U3.1 | length 6.3
  Bottom Layer w0.254: U3.1 2.011,-29.025 3.912,-27.124 R16.2
IN-: R16.1 U3.2 | length 12.9
  Bottom Layer w0.254: U3.2 7.772,-29.675 8.179,-30.081 8.179,-32.956 7.807,-33.328 R16.1
IO-!RESET: P1.75
IO-CH1-PROT: P1.80 P17.7 | length 66
  Top Layer w0.254: P1.80 -2.337,10.309 v1(-2.337,10.846)
  Bottom Layer w0.254: P17.7 -60.249,-1.321 -13.408,-1.321 -5.126,6.961 -5.126,8.057 v1(-2.337,10.846)
IO-CH2-PROT: P1.78 P17.8 | length 79.8
  Top Layer w0.254: P1.78 -0.889,9.809 v1(-0.254,9.174)
  Layer 1 w0.254: P17.8 -62.484,1.016 -62.484,3.238 -62.141,3.581 -60.287,3.581 -59.944,3.238 -59.944,1.93 -59.538,1.524 -57.848,1.524 -57.404,1.968 -57.404,3.238 -57.087,3.556 -0.693,3.556 -0.124,2.987 0.848,2.987 0.884,3.023 0.884,4.176 0.481,4.578 0.481,8.439 v1(-0.254,9.174)
IO-CH3-PROT: P1.76 P17.9 | length 62.9
  Top Layer w0.254: v1(-16.898,1.524) -9.113,9.309 P1.76
  Layer 1 w0.254: P17.9 -60.071,1.143 -57.32,1.143 -56.939,1.524 v1(-16.898,1.524)
IO-CH4-PROT: P1.74 P17.10 | length 65.1
  Top Layer w0.254: P1.74 -1.435,8.809 v1(-0.33,7.704)
  Layer 1 w0.254: P17.10 -60.071,6.477 -54.991,6.477 -54.635,6.121 -1.913,6.121 v1(-0.33,7.704)
IO-CH5-PROT: P1.72 P17.11 | length 71.8
  Top Layer w0.254: P1.72 -1.6,8.309 -1.041,7.75 v1(-1.041,4.902)
  Layer 1 w0.254: P17.11 -62.484,6.604 -62.484,4.47 -62.078,4.064 -58.42,4.064 -57.404,5.08 -57.404,5.779 -57.087,6.096 -55.372,6.096 -53.764,4.488 -1.455,4.488 v1(-1.041,4.902)
IO-CH6-PROT: P1.70 P17.12 | length 59.9
  Top Layer w0.254: v1(-5.679,8.13) -3.641,8.13 -3.319,7.809 P1.70
  Layer 1 w0.254: P17.12 -60.198,8.89 -6.439,8.89 v1(-5.679,8.13)
IO-CH7-PROT: P1.68 P17.13 | length 61.2
  Top Layer w0.254: v1(-4.293,7.626) -3.975,7.309 P1.68
  Layer 1 w0.254: P17.13 -60.198,11.43 -44.374,11.43 -42.291,9.347 -6.014,9.347 v1(-4.293,7.626)
IO-CH8-PROT: P1.66 P17.14 | length 65.3
  Top Layer w0.254: v1(-10.109,5.537) -10.109,7.035 -9.224,7.921 -6.299,7.921 -5.187,6.809 P1.66
  Bottom Layer w0.254: P17.14 -60.198,13.97 -18.542,13.97 v1(-10.109,5.537)
IO-SWCLK: P1.71 P8.5 | length 104.4
  Top Layer w0.254: P1.71 4.648,8.309 5.509,9.169 6.782,9.169 17.399,19.787 17.399,70.739 25.146,78.486 38.849,78.486 39.167,78.168 39.167,75.87 39.141,75.844 37.44,75.844 36.932,76.352 34.125,76.352 33.8,76.027 P8.5
IO-SWDIO: P1.69 P8.4 | length 95.2
  Top Layer w0.254: v1(1.321,7.809) P1.69 ; v1(34.6,50.145) P8.4
  Layer 1 w0.254: v1(1.321,7.809) 1.967,7.163 7.62,7.163 7.645,7.188 7.645,10.541 7.137,11.049 1.943,11.049 1.499,11.493 1.499,17.043 v1(34.6,50.145)
IO-USART1_RX_SPECTRUM_DSM: P1.48 P8.3 SPKT100.1 | length 110.7
  Top Layer w0.254: v1(-7.239,-0.403) -4.527,2.309 P1.48 ; P8.3 35.4,31.1 SPKT100.1
  Bottom Layer w0.254: v1(-7.239,-0.403) -7.239,3.2 20.726,31.166 35.334,31.166 SPKT100.1
IO-USART1_TX: P1.46 P8.2 | length 106.9
  Top Layer w0.254: P1.46 v1(-1.138,1.809) ; P8.2 36.2,34.59 37.359,33.43 37.359,13.128 v1(36.982,12.751)
  Layer 1 w0.254: v1(-1.138,1.809) -1.122,1.825 21.281,1.825 32.207,12.751 v1(36.982,12.751)
NetD2_C: D2.C L4.P$2 P4.1 | length 22.8
  Top Layer w0.254: P4.1 v1(60.012,-11.875)
  Bottom Layer w0.254: L4.P$2 59.88,-28.372 60.012,-28.24 D2.C v1(60.012,-11.875)
NetD5_C: D5.C L6.P$2 P5.1 | length 25.4
  Top Layer w0.254: P5.1 24.55,9.488 v1(25.146,10.084)
  Layer 2 w0.254: v1(23.038,20.396) 25.146,18.288 v1(25.146,10.084)
  Bottom Layer w0.254: v1(23.038,20.396) 23.038,23.622 L6.P$2 22.695,24.435 23.046,24.084 D5.C
NetD6_C: D6.C L7.P$2 P10.1 | length 5.9
  Top Layer w0.254: v1(22.588,-11.354) 23.317,-10.625 P10.1
  Bottom Layer w0.254: D6.C 20.396,-10.084 20.447,-10.135 L7.P$2 20.447,-11.011 20.79,-11.354 v1(22.588,-11.354)
NetD7_C: D7.C L8.P$2 P7.1 | length 11.3
  Top Layer w0.254: v1(53.569,21.514) 53.569,16.9 53.594,16.875 P7.1
  Bottom Layer w0.254: L8.P$2 48.895,21.158 48.997,21.057 D7.C 53.111,21.057 v1(53.569,21.514)
NetD8_C: D8.C L10.P$2 P12.1 | length 51.9
  Top Layer w0.254: P12.1 40.983,-11.875 v1(41.351,-12.243)
  Layer 2 w0.254: v1(34.331,27.813) 34.331,27.239 41.351,20.218 v1(41.351,-12.243)
  Bottom Layer w0.254: D8.C 30.582,25.341 30.777,25.146 L10.P$2 31.547,27.457 31.902,27.813 v1(34.331,27.813)
NetD9_C: D9.C L9.P$2 P11.1 | length 27.3
  Bottom Layer w0.254: 54.534,10.567 51.054,14.047 51.054,17.98 55.363,22.288 L9.P$2 D9.C
  Bottom Layer w0.3: 54.534,10.567 54.534,9.133 57.089,6.579 57.089,6.211 59.276,4.024 P11.1
NetD10_C: D10.C D300.CATHODE L11.P$1 | length 12.2
  Bottom Layer w0.254: D300.CATHODE -56.337,-33.711 -56.147,-33.901 D10.C -50.267,-33.901 -50.157,-34.011 L11.P$1
NetR14_1: R14.1 U3.7 | length 3
  Bottom Layer w0.254: R14.1 -3.95,-29.675 U3.7
NetR15_1: R15.1 U3.8 | length 3.6
  Bottom Layer w0.254: R15.1 -3.95,-27.153 -3.073,-28.029 -3.073,-28.657 -2.705,-29.025 U3.8
OTG_DM1: P1.33 P14.3 | length 33.4
  Top Layer w0.254: v1(1.88,-0.597) 1.88,-0.914 2.159,-1.194 P1.33 ; v1(23.343,10.82) 23.343,15.303 23.664,15.625 P14.3
  Layer 1 w0.254: v1(13.614,10.82) v1(23.343,10.82)
  Bottom Layer w0.254: v1(1.88,-0.597) 2.197,-0.597 v1(13.614,10.82)
OTG_DP1: P1.31 P14.2 | length 31.4
  Top Layer w0.254: P1.31 3.416,-1.702 4.28,-0.838 8.915,-0.838 22.809,13.056 22.809,16.354 23.33,16.875 P14.2
PERIPH_5V: D4.C L5.P$2 P6.1 | length 28.9
  Top Layer w0.254: v1(36.474,25.933) 36.474,3.556 36.905,3.125 P6.1
  Bottom Layer w0.254: L5.P$2 36.622,25.637 D4.C 37.744,25.908 37.719,25.933 v1(36.474,25.933)
PPM-SBUS-PROT: P1.62 P17.15 | length 66.9
  Top Layer w0.254: v1(-8.788,5.232) -8.788,6.702 -8.026,7.464 -7.087,7.464 -7.061,7.004 -5.866,5.809 P1.62
  Bottom Layer w0.254: P17.15 -60.147,16.459 -20.015,16.459 v1(-8.788,5.232)
PRESSURE_SENS_IN: ADC_PR1.P$1 P1.21 P3.2 | length 48.4
  Top Layer w0.254: P1.21 3.988,-4.216 4.14,-4.369 ADC_PR1.P$1 5.309,-3.374 v1(5.626,-3.057) ; v1(37.186,8.814) 37.846,9.474 37.846,14.668 38.178,15 P3.2
  Bottom Layer w0.254: v1(5.626,-3.057) 17.497,8.814 v1(37.186,8.814)
RX_5V0_OUT: "P17.RX 5V" PSM1.RX | length 132.7
  Layer 2 w0.254: -58.928,17.78 -57.658,16.51 -50.965,16.51 -50.394,15.938 -50.394,-47.092 v1(-28.931,-68.555)
  Bottom Layer w0.254: v1(-28.931,-68.555) -1.753,-68.555 -1.317,-68.99 PSM1.RX
S.BUS_OUT: P1.64 P16.1 | length 54.7
  Top Layer w0.254: v1(-6.39,7.076) -5.623,6.309 P1.64
  Bottom Layer w0.254: P16.1 -48.327,23.673 -22.987,23.673 v1(-6.39,7.076)
SAFETY: P1.17 P10.6 | length 32.9
  Top Layer w0.254: P1.17 15.075,-5.207 15.494,-5.626 v1(15.494,-10.592) ; P10.6 25.87,-16.88 v1(26.277,-16.473)
  Layer 1 w0.254: v1(15.494,-10.592) 20.396,-10.592 v1(26.277,-16.473)
SCL: R12.1 U3.5 | length 5.1
  Bottom Layer w0.254: R12.1 -4.013,-33.95 -4.013,-31.331 -3.658,-30.975 U3.5
SDA: R13.1 U3.6 | length 7.8
  Bottom Layer w0.254: R13.1 -6.02,-33.95 -6.02,-30.734 -5.611,-30.325 U3.6
SERIAL1_CTS: P1.44 P4.4 | length 78.7
  Top Layer w0.254: v1(-5.757,0.362) -4.809,1.309 P1.44 ; v1(48.946,-4.902) 48.946,-13.767 50.814,-15.635 P4.4
  Layer 1 w0.254: v1(-5.757,0.362) -5.757,-3.832 -5.232,-4.356 -2.494,-4.356 -2.181,-4.043 -0.699,-4.043 -0.508,-4.233 0.885,-4.233 1.753,-5.101 7.387,-5.101 7.587,-4.902 v1(48.946,-4.902)
SERIAL1_RTS: P1.42 P4.5 | length 76.4
  Top Layer w0.254: v1(-3.658,-1.829) -5.063,-0.423 -5.063,0.462 -4.716,0.809 P1.42 ; v1(44.78,-2.311) 48.362,-5.893 48.362,-16.511 48.73,-16.88 P4.5
  Layer 1 w0.254: v1(-3.658,-1.829) -3.175,-2.311 1.118,-2.311 1.318,-2.511 6.054,-2.511 6.253,-2.311 v1(44.78,-2.311)
SERIAL1_RX: P1.38 P4.3 S5.P$1 | length 83.3
  Top Layer w0.254: P1.38 -1.799,-0.203 -1.549,0.047 v1(-1.549,0.368) ; v1(50.013,-3.327) 50.013,-13.118 51.27,-14.375 P4.3 57.683,-14.375 57.837,-14.529 S5.P$1
  Layer 1 w0.254: v1(-1.549,0.368) -3.027,0.368 -4.445,-1.05 -4.445,-2.222 -3.975,-2.692 0.335,-2.692 0.568,-2.925 4.203,-2.925 5.236,-3.958 6.244,-3.958 7.51,-2.692 37.287,-2.692 37.922,-3.327 v1(50.013,-3.327)
SERIAL1_TX: P1.40 P4.2 S4.P$1 | length 80.2
  Top Layer w0.254: v1(-4.559,0.013) -4.267,0.305 P1.40 ; v1(52.248,-7.112) 52.248,-12.636 52.736,-13.125 P4.2 60.129,-13.125 S4.P$1
  Layer 1 w0.254: v1(-4.559,0.013) -4.877,-0.305 -4.877,-3.285 -4.275,-3.886 -4.224,-3.886 -4,-3.662 -0.284,-3.662 -0.258,-3.687 2.173,-3.687 2.577,-4.09 3.844,-4.09 4.474,-4.72 7.006,-4.72 7.637,-4.09 49.226,-4.09 v1(52.248,-7.112)
SERIAL2_CTS: P1.32 P6.4 | length 42.7
  Top Layer w0.254: P1.32 v1(-1.359,-1.702) ; v1(35.722,-0.635) P6.4
  Layer 1 w0.254: v1(-1.359,-1.702) -0.749,-1.092 1.053,-1.092 1.349,-1.388 2.155,-1.388 2.705,-0.838 35.519,-0.838 v1(35.722,-0.635)
SERIAL2_RTS: P1.30 P6.5 | length 47.4
  Top Layer w0.254: v1(-4.242,-3.2) -3.251,-2.21 P1.30 ; v1(36.792,-3.2) 38.113,-1.88 P6.5
  Layer 1 w0.254: v1(-4.242,-3.2) 0.084,-3.2 0.19,-3.306 3.301,-3.306 3.395,-3.4 3.916,-3.4 4.855,-4.339 6.625,-4.339 7.764,-3.2 v1(36.792,-3.2)
SERIAL2_RX: P1.34 P6.3 S7.P$1 | length 43.3
  Top Layer w0.254: P1.34 -1.181,-1.194 v1(0.152,0.14) ; v1(31.267,0.457) 31.435,0.625 S7.P$1 P6.3
  Layer 1 w0.254: v1(0.152,0.14) 1.076,1.063 7.545,1.063 8.15,0.457 v1(31.267,0.457)
SERIAL2_TX: P1.36 P6.2 S6.P$1 | length 45.1
  Top Layer w0.254: P1.36 -1.511,-0.711 v1(0.445,1.245) ; S6.P$1 38.095,1.875 ; v1(37.465,1.245) 38.095,1.875 ; P6.2 38.095,1.875
  Layer 1 w0.254: v1(0.445,1.245) 0.644,1.444 8.044,1.444 8.243,1.245 v1(37.465,1.245)
SERIAL3_RX: P1.20 P10.3 S9.P$1 | length 37.3
  Top Layer w0.254: P1.20 -1.676,-4.699 v1(-1.448,-4.928) ; v1(19.99,-13.125) P10.3 27.915,-13.125 27.947,-13.157 S9.P$1
  Layer 1 w0.254: v1(-1.448,-4.928) 6.75,-13.125 v1(19.99,-13.125)
SERIAL3_TX: P1.22 P10.2 S8.P$1 | length 53.2
  Top Layer w0.254: v1(-6.972,-4.661) -6.528,-4.216 P1.22 ; v1(20.625,-11.875) P10.2 30.094,-11.875 S8.P$1
  Layer 1 w0.254: v1(-6.972,-4.661) -6.426,-5.207 -2.235,-5.207 10.033,-17.475 18.593,-17.475 20.625,-15.443 v1(20.625,-11.875)
SERIAL4_RX: P1.16 P12.3 S11.P$1 | length 62.3
  Top Layer w0.254: v1(-9.373,-4.699) S11.P$1 -8.797,-5.969 -8.687,-6.079 -7.794,-6.079 -7.43,-5.715 P1.16 ; v1(38.329,-14.375) P12.3
  Layer 1 w0.254: v1(-9.373,-4.699) -8.424,-3.75 -7.095,-3.75 -6.096,-4.75 -2.278,-4.75 -1.952,-4.424 -0.944,-4.424 4.488,-9.855 33.809,-9.855 v1(38.329,-14.375)
SERIAL4_TX: P1.18 P12.2 S10.P$1 | length 70.1
  Top Layer w0.254: v1(-8.293,-5.575) -7.925,-5.207 P1.18 ; P12.2 40.64,-13.125 ; v1(40.665,-15.011) 40.665,-13.15 40.64,-13.125 ; S10.P$1 42.857,-13.157 42.824,-13.125 40.64,-13.125
  Layer 1 w0.254: v1(-8.293,-5.575) -5.52,-8.348 -5.52,-8.873 3.591,-17.983 37.694,-17.983 v1(40.665,-15.011)
SERIAL5_RX: P1.12 P9.3 P16.4 S13.P$1 | length 142.5
  Top Layer w0.254: P16.4 -47,72.609 -41.199,78.41 -31.28,78.41 -30.836,77.965 -30.836,74.358 -31.153,74.041 -34.282,74.041 -34.6,74.358 P9.3 ; v1(-7.239,-7.518) S13.P$1 -4.674,-6.909 -4.47,-6.706 P1.12
  Layer 1 w0.254: v1(-23.089,-6.985) -22.555,-7.518 v1(-7.239,-7.518)
  Layer 2 w0.254: P16.4 -45.749,23.749 -37.567,23.749 -23.089,9.271 v1(-23.089,-6.985)
SERIAL5_TX: P1.14 P9.2 P16.2 S12.P$1 | length 126.4
  Top Layer w0.254: P9.2 v1(-33.8,75.844) ; v1(-14.907,-8.992) S12.P$1 -11.89,-6.731 -7.618,-6.731 -7.034,-6.147 -5.486,-6.147 -5.436,-6.198 P1.14
  Layer 2 w0.254: v1(-33.8,75.844) -49.54,60.104 P16.2 -48.209,23.669 -48.209,14.122 -25.095,-8.992 v1(-14.907,-8.992)
SPI_EXT_MISO: P1.67 SPI_MISO1.P$1 | length 2.6
  Top Layer w0.254: P1.67 3.962,7.309 4.117,7.154 SPI_MISO1.P$1
SPI_EXT_MOSI: P1.51 SPI_MOSI1.P$1 | length 2.6
  Top Layer w0.254: P1.51 3.962,3.309 4.117,3.154 SPI_MOSI1.P$1
SPI_EXT_SCK: P1.73 SPI_SCK1.P$1 | length 2.9
  Top Layer w0.254: P1.73 4.197,8.809 SPI_SCK1.P$1
V\B\U\S\_\V\A\L\I\D\: P1.59 PSM1.!VBUS_VALID | length 60.3
  Top Layer w0.254: v1(1.761,5.338) 1.791,5.309 P1.59
  Layer 2 w0.254: v1(1.27,-46.66) 1.27,-15.006 -2.408,-11.328 -2.705,-11.328 -3.908,-10.126 -3.908,-7.696 -3.15,-6.938 -3.15,1.638 -0.682,4.106 0.529,4.106 v1(1.761,5.338)
  Bottom Layer w0.254: PSM1.!VBUS_VALID 0.686,-47.244 v1(1.27,-46.66)
V\D\D\_\5\V\_\H\I\P\O\W\E\R\_\O\C\: P1.45 PSM1.!VDD_5V_HIPOWER_OC | length 75.1
  Top Layer w0.254: v1(-8.179,-65.5) -8.179,-15.545 -2.388,-9.754 -1.118,-9.754 -0.559,-9.195 -0.559,-3.353 1.376,-1.418 1.376,1.152 2.032,1.809 P1.45
  Bottom Layer w0.254: PSM1.!VDD_5V_HIPOWER_OC v1(-8.179,-65.5)
V\D\D\_\5\V\_\P\E\R\I\P\H\_\E\N\: P1.27 PSM1.!VDD_5V_PERIPH_EN | length 67
  Top Layer w0.254: v1(-4.483,-59.492) -4.166,-59.492 -1.156,-56.482 -1.156,-10.49 -0.127,-9.461 -0.127,-3.48 0.66,-2.692 P1.27
  Bottom Layer w0.254: PSM1.!VDD_5V_PERIPH_EN v1(-4.483,-59.492)
V\D\D\_\5\V\_\P\E\R\I\P\H\_\O\C\: P1.43 PSM1.!VDD_5V_PERIPH_OC | length 102.2
  Top Layer w0.254: P1.43 3.72,1.444 7.68,1.444 8.966,2.73 v1(8.966,4.694)
  Layer 2 w0.254: v1(-11.811,-63.5) -13.691,-61.62 -13.691,-11.367 -13.373,-11.049 -8.915,-11.049 -5.512,-7.645 -5.512,-1.881 -4.039,-0.408 -4.039,5.309 -0.991,8.357 5.304,8.357 v1(8.966,4.694)
  Bottom Layer w0.254: v1(-11.811,-63.5) PSM1.!VDD_5V_PERIPH_OC
V\D\D\_\B\A\C\K\U\P\_\V\A\L\I\D\: P1.57 PSM1.!VDD_BACKUP_VALID | length 74.4
  Top Layer w0.254: v1(-0.025,4.809) P1.57
  Layer 2 w0.254: v1(-11.151,-47.041) -11.151,-19.609 -12.649,-18.11 -12.649,-16.908 -4.949,-9.208 -4.949,-2.066 -3.556,-0.673 -3.556,3.277 -1.372,5.461 -0.678,5.461 v1(-0.025,4.809)
  Bottom Layer w0.254: v1(-11.151,-47.041) -8.509,-49.682 -1.753,-49.682 -1.317,-49.247 PSM1.!VDD_BACKUP_VALID
V\D\D\_\B\R\I\C\K\_\V\A\L\I\D\: P1.55 PSM1.!VDD_BRICK_VALID | length 64.9
  Top Layer w0.254: P1.55 v1(5.309,4.309)
  Layer 2 w0.254: v1(1.651,-1.892) 5.309,1.765 v1(5.309,4.309)
  Bottom Layer w0.254: PSM1.!VDD_BRICK_VALID -3.317,-43.342 -7.29,-39.37 -7.29,-25.984 5.207,-13.487 5.207,-5.448 v1(1.651,-1.892)
VBUS: P1.29 P14.1 PSM1.VBUS PSM1.VDD_VBUS | length 146
  Top Layer w0.254: P1.29 3.835,-2.21 v1(4.42,-1.626) ; v1(22.291,18.125) P14.1 29.68,18.125 30.124,17.68 30.124,-1.727 32.487,-4.089 32.487,-21.061 32.106,-21.442 v1(32.106,-38.481)
  Bottom Layer w0.254: PSM1.VBUS -0.356,-57.485 -0.17,-57.3 9.75,-57.3 9.75,-55.3 15.287,-55.3 v1(32.106,-38.481) ; v1(4.42,-1.626) 5.227,-0.818 5.804,-0.818 5.835,-0.21 19.05,13.005 19.05,14.884 v1(22.291,18.125)
VCC: C7.2 R12.2 R13.2 U3.4 | length 10.8
  Bottom Layer w0.254: R13.2 R12.2 -2.692,-36.05 -2.573,-36.17 C7.2 0.559,-34.365 0.559,-30.975 U3.4
VDD_3V3_SPEKTRUM: D3.C PSM1.SPEK SPKT100.3 | length 128.3
  Layer 2 w0.254: v1(14.402,-71.247) 37.592,-48.057 37.592,-13.792 37.973,-13.411 37.973,18.593 33.476,23.09 SPKT100.3
  Bottom Layer w0.254: PSM1.SPEK 2.692,-71.247 v1(14.402,-71.247) ; SPKT100.3 34.92,28.556 D3.C
VDD_3V3_SPEKTRUM_EN: P1.19 PSM1.VDD_3V3_SPEKTRUM_EN | length 66.2
  Top Layer w0.254: v1(-3.48,-60.312) -0.254,-57.087 -0.254,-44.856 1.473,-43.129 1.473,-13.17 1.841,-12.802 1.841,-10.109 1.626,-9.893 1.626,-5.016 1.943,-4.699 P1.19
  Bottom Layer w0.254: PSM1.VDD_3V3_SPEKTRUM_EN -4.668,-61.5 v1(-3.48,-60.312)
VDD_5V_BACKUP: P15.1 P15.2 PSM1.VDD_5V_BACKUP | length 45.6
  Top Layer w0.254: v1(42.092,-71.733) P15.1 42.092,-76.683 44.092,-76.683 P15.2
  Layer 1 w0.254: v1(16.662,-61.874) 32.233,-61.874 v1(42.092,-71.733)
  Bottom Layer w0.254: PSM1.VDD_5V_BACKUP@9.75,-59.4 9.75,-61.4 16.188,-61.4 v1(16.662,-61.874)
VDD_5V_BRICK: J1.P PSM1.VDD_BRICK_IN | length 24.5
  Layer 1 w0.254: v1(17.551,-65.5) 22.11,-65.5 J1.P
  Bottom Layer w0.254: PSM1.VDD_BRICK_IN@9.75,-63.5 9.75,-65.5 v1(17.551,-65.5)
VDD_5V_HIPOWER: L4.P$1 PSM1.5V_HIPOWER | length 82.4
  Bottom Layer w0.254: PSM1.5V_HIPOWER -5.317,-72.238 -5.292,-72.263 15.164,-72.263 L4.P$1
VDD_5V_IN_PROT: P1.61 P1.63 PSM1.VDD_5V_IN_PROT | length 72.7
  Top Layer w0.254: v1(0.991,5.588) 1.711,6.309 P1.63 P1.61
  Bottom Layer w0.254: PSM1.VDD_5V_IN_PROT -5.317,-46.787 -8.357,-43.748 -8.357,-10.577 -4.561,-6.782 1.816,-6.782 2.311,-6.286 2.311,-3.746 2.189,-3.624 -1.431,-3.624 -2.07,-2.984 -2.07,5.271 -1.753,5.588 v1(0.991,5.588)
VDD_5V_PERIPH: L3.P$1 L5.P$1 L6.P$1 L7.P$1 L8.P$1 L9.P$1 L10.P$1 P8.1 P9.1 PSM1.5V_PERIPH | length 280.8
  Top Layer w0.254: P9.1 -33,75.387 -32.69,75.387 v1(-32.36,75.717) ; v1(35.179,75.844) 36.665,75.844 37,75.509 P8.1 v1(37,38.956)
  Layer 1 w0.254: v1(-32.36,75.717) 35.052,75.717 v1(35.179,75.844)
  Layer 2 w0.254: v1(-3.317,-69.342) -3.317,-64.125 v1(23.114,-37.694) ; v1(32.664,27.203) 32.639,27.229 32.639,34.595 v1(37,38.956)
  Bottom Layer w0.254: PSM1.5V_PERIPH v1(-3.317,-69.342) ; L6.P$1 22.568,25.705 27.28,25.705 29.235,23.749 32.715,23.749 33.16,24.194 L10.P$1 33.833,25.146 33.934,25.248 L5.P$1 ; v1(23.114,-37.694) 23.114,-10.909 22.695,-10.49 L7.P$1 41.173,8.623 41.173,22.288 41.656,22.771 L8.P$1 ; v1(32.664,27.203) L5.P$1 ; L3.P$1 34.531,23.241 ; L9.P$1 50.94,22.682 50.851,22.771 L8.P$1 ; 34.531,23.241 34.912,23.622 47.231,23.622 L8.P$1 ; 34.531,23.241 34.531,23.901 34.62,23.99 L5.P$1
VDD_SERVO: "P17.SERVO VCC" D300.ANODE P1.53 P16.3 | length 124.6
  Top Layer w0.254: -58.928,-17.78 -58.928,-15.24 -58.928,-12.7 -58.928,-10.16 -58.928,-7.62 -58.928,-5.08 -58.928,-2.54 -58.928,0 -58.928,2.54 -58.928,5.08 -58.928,7.62 -58.928,10.16 -58.928,12.7 -58.928,15.24 ; v1(0.38,3.491) 0.697,3.809 P1.53
  Layer 1 w0.254: -58.928,2.54 -57.531,3.937 -0.066,3.937 v1(0.38,3.491) ; -58.928,15.24 -57.658,16.51 -52.95,16.51 P16.3
  Bottom Layer w0.254: D300.ANODE -58.928,-17.78
VDD_SERVO_IN: L11.P$2 P1.9 PSM1.SERVO_IN | length 106.3
  Top Layer w0.254: v1(2.007,-49.149) 2.007,-13.399 2.222,-13.183 2.222,-9.944 2.007,-9.728 2.007,-7.239 2.032,-7.214 P1.9
  Bottom Layer w0.254: L11.P$2 -18.517,-34.011 -10.058,-42.469 -10.058,-47.346 -8.128,-49.276 -2.705,-49.276 -2.311,-48.882 -2.311,-46.939 -1.295,-45.923 2.375,-45.923 2.692,-46.241 PSM1.SERVO_IN 2.692,-49.124 2.667,-49.149 v1(2.007,-49.149)
pads on no net: *.0 *.1 *.2 *.3 *.4 *.5 *.6 *.7 *.8 *.9 *.10 *.11 *.12 *.13 *.14 C7.1 P1.26 P1.65 P1.hole-1 P1.hole-2 PSM1.NC

## Polygon pours and split planes (outlines as drawn)
GND on Top Layer "GND_L01_P000" (solid, pour order 0): -61.798,77.978 -61.595,78.181 62.128,78.181 62.128,-77.241 61.265,-76.378 -61.392,-76.378 -61.392,77.953 -61.671,78.232 -61.646,78.257 -61.62,78.257
GND on Top Layer "GND_L01_P001" (solid, pour order 1): -61.595,78.181 -61.595,78.219 -61.531,78.156 -61.531,78.092
no net on Mechanical 1 "NONET_L-01_P-001" (none): -63.627,-80.061 -63.627,79.959 64.11,79.959 64.186,79.883 64.186,32.972 ccw(c67.186,32.972) 67.186,29.972 67.183,29.972 140.332,29.972 cw(c140.332,26.972) 143.332,26.972 143.332,-27.023 cw(c140.332,-27.023) 140.332,-30.023 67.11,-30.023 ccw(c67.11,-33.023) 64.11,-33.023 64.11,-80.035 64.084,-80.061
no net on Multi-Layer "NONET_L04_P003" (none, pour order 3): 70.5,-7.7 ccw(c75.5,-7.7) 75.5,-12.7 75.519,-12.696 91.008,-12.696 91,-12.7 ccw(c91,-7.7) 96,-7.7 96,7.7 ccw(c91,7.7) 91,12.7 75.803,12.705 ccw(c75.803,7.402) 70.5,7.402
GND on Bottom Layer "GND_L04_P002" (solid, pour order 2): -61.392,78.232 61.925,78.232 61.976,78.283 62.027,78.232 62.027,-76.53 -61.417,-76.53 -61.468,-76.479 -61.392,-76.403 -61.392,78.207

## Silkscreen, mask and mechanical layers (free items; w line width, h text height)
Top Overlay:
  text "Type-A Connector" at -4.293,-14.656 h0.7
Bottom Overlay:
  circle w0.1: c-20.906,13.541 r1.5
  circle w0.1: c9.091,-16.457 r1.5
Mechanical 1:
  lines w0.3: 75.5,-12.7 cw(c75.5,-7.7) 70.5,-7.7 70.5,7.402 cw(c75.803,7.402) 75.803,12.705 91,12.7 cw(c91,7.7) 96,7.7 96,-7.7 cw(c91,-7.7) 91,-12.7 ; 75.514,-12.7 75.519,-12.696 91.008,-12.696
  lines w0.5: -63.627,-80.061 64.084,-80.061 64.11,-80.035 64.11,-33.023 cw(c67.11,-33.023) 67.11,-30.023 140.332,-30.023 ccw(c140.332,-27.023) 143.332,-27.023 143.332,26.972 ccw(c140.332,26.972) 140.332,29.972 67.183,29.972 67.186,29.972 cw(c67.186,32.972) 64.186,32.972 64.186,79.883 64.11,79.959 -63.627,79.959 -63.627,-80.061
Mechanical 3:
  lines w0.3: 64.084,-80.061 -63.627,-80.061 -63.627,79.959 64.11,79.959 64.186,79.883 64.186,32.972 ccw(c67.186,32.972) 67.186,29.972 ; 64.11,-80.035 64.11,-33.023 cw(c67.11,-33.023) 67.11,-30.023 140.332,-30.023 ccw(c140.332,-27.023) 143.332,-27.023 143.332,26.972 ccw(c140.332,26.972) 140.332,29.972 67.183,29.972

## Text inside footprints (layer, text, board x,y; h text height)
P1: Top Overlay "Male" at -0.868,4.619 h1.97 r270
PSM1: Bottom Overlay "3DR Part# PCA_0007" at -4.61,-61.82 h0.7 r225; Bottom Overlay "IN_5V_A" at 10.8,-65.4 h0.7 r270; Bottom Overlay "IN_5V_B" at 10.8,-61.5 h0.7 r270; Bottom Overlay "IN_5V_USB" at 10.8,-57.6 h0.7 r270; Bottom Overlay "3v3 SPEK" at 3.4,-71.5 h0.7 r180; Bottom Overlay "5V RX" at -2,-72.2 h0.7 r180; Bottom Overlay "NC" at 0.4,-72.193 h0.7 r180; Bottom Overlay "5v P" at -3.9,-72.2 h0.7 r180; Bottom Overlay "5V HP" at -6.1,-72.2 h0.7 r180; Bottom Overlay "GND" at -7.9,-47 h0.7 r180; Bottom Overlay "Servo_VIN" at 3.4,-47.6 h0.7 r180; Bottom Overlay "U_OK" at 0,-47 h0.7 r180; Bottom Overlay "B_OK" at -2,-47 h0.7 r180; Bottom Overlay "A_OK" at -4,-47 h0.7 r180; Bottom Overlay "FMU_5V" at -6.3,-47 h0.7 r180; Bottom Overlay "GND" at -7.9,-72.1 h0.7 r180; Bottom Overlay "BUZZ" at -11.6,-54.1 h0.7 r270; Bottom Overlay "HP OC" at -11.6,-66.6 h0.7 r270; Bottom Overlay "P OC" at -11.6,-64 h0.7 r270; Bottom Overlay "S EN" at -11.6,-62 h0.7 r270; Bottom Overlay "P EN" at -11.6,-60 h0.7 r270; Bottom Overlay "VBUS" at -11.6,-58.2 h0.7 r270; Bottom Overlay "ALM" at -11.6,-56 h0.7 r270; Bottom Overlay "POWER IN" at 6.35,-60.89 h0.7 r270; Bottom Overlay "IO and power PixHawk2" at -3.81,-62.62 h0.7 r225